# Altium PCB Proyecto_Multicapa_PCB.PcbDoc (part 1 of 2)
Units mil, origin at the board's own origin, x right, y up, seen from the top; angles counter-clockwise.
Board outline 2000 x 2600 mil, 6 copper layers (L1, L2 (GND), L3, L4, L5 (PWR), L6), stack 61.067 mil thick; 106 components, 104 nets, 402 pads, 132 vias.
Unrouted connection lines stored in the file: 69.
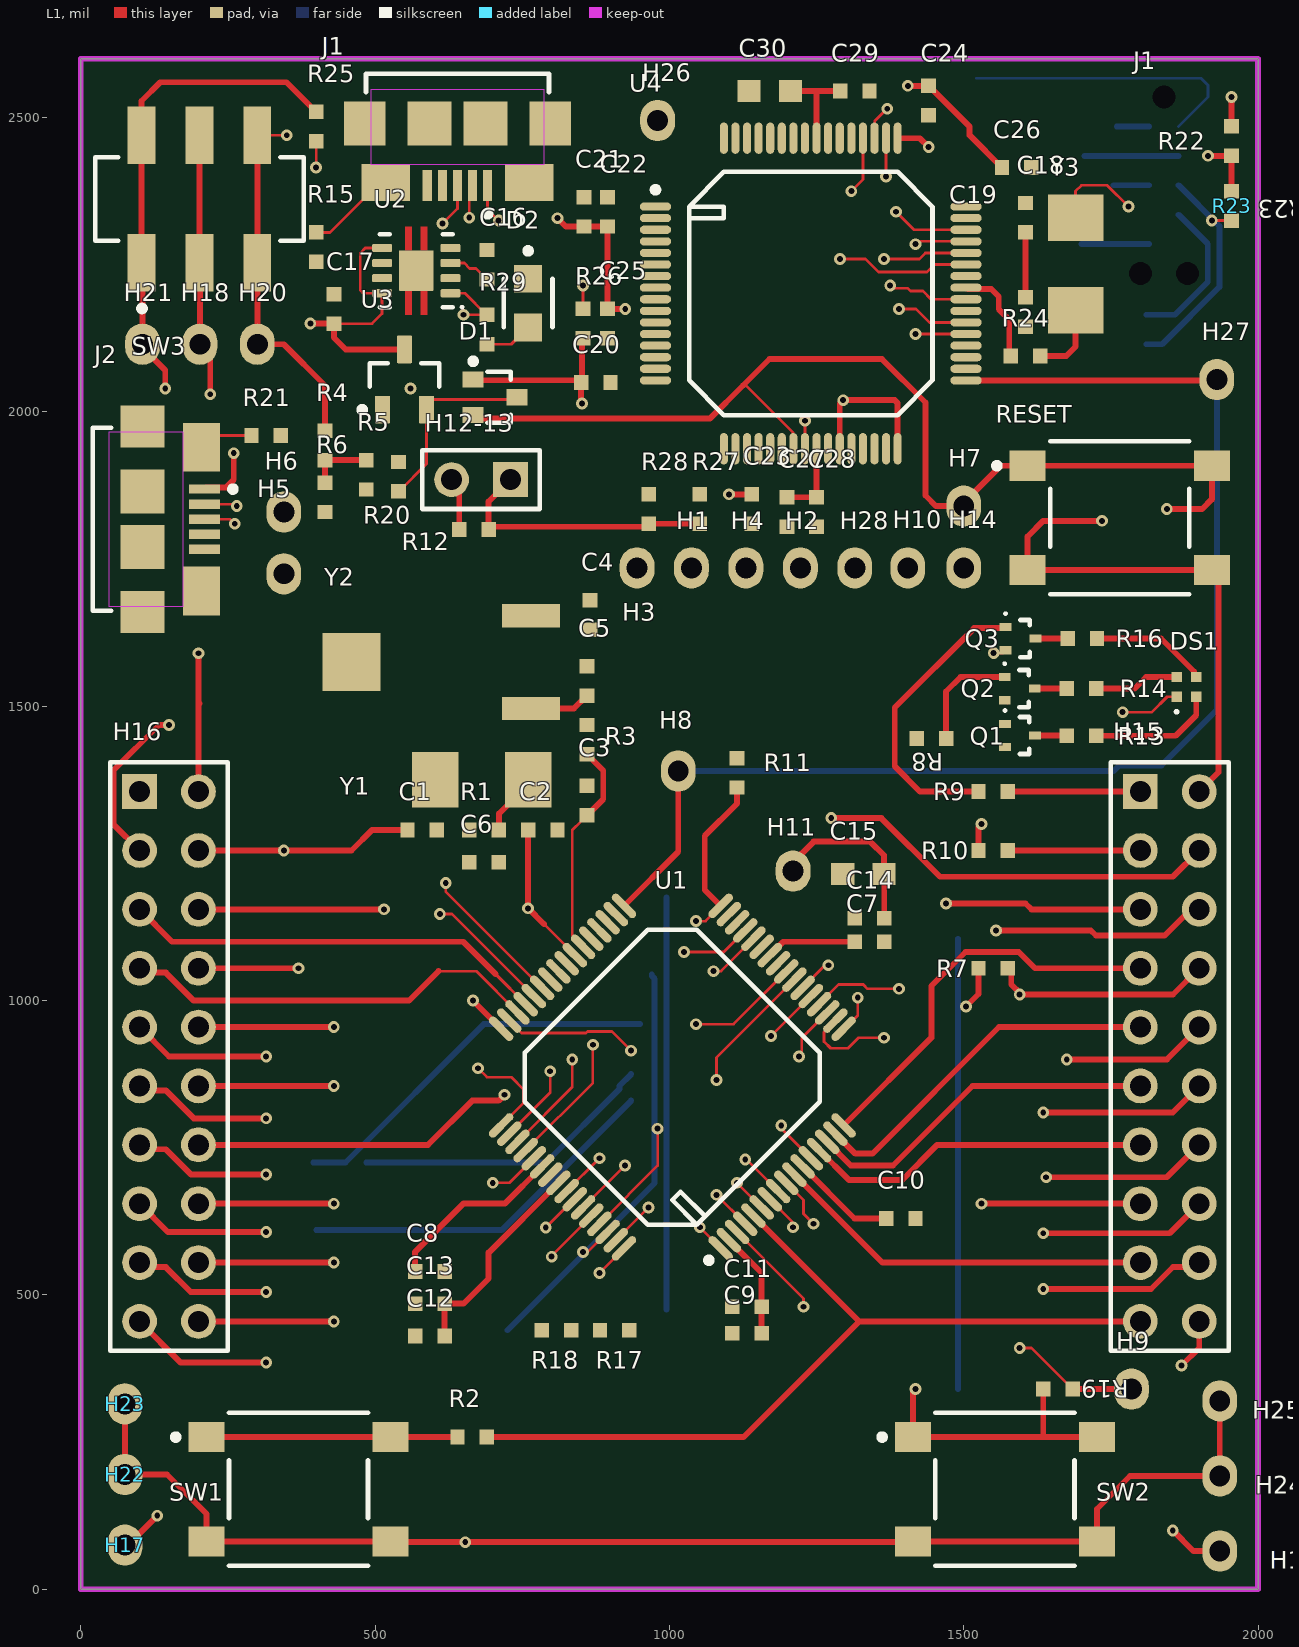
[diagram p0: L1 view]
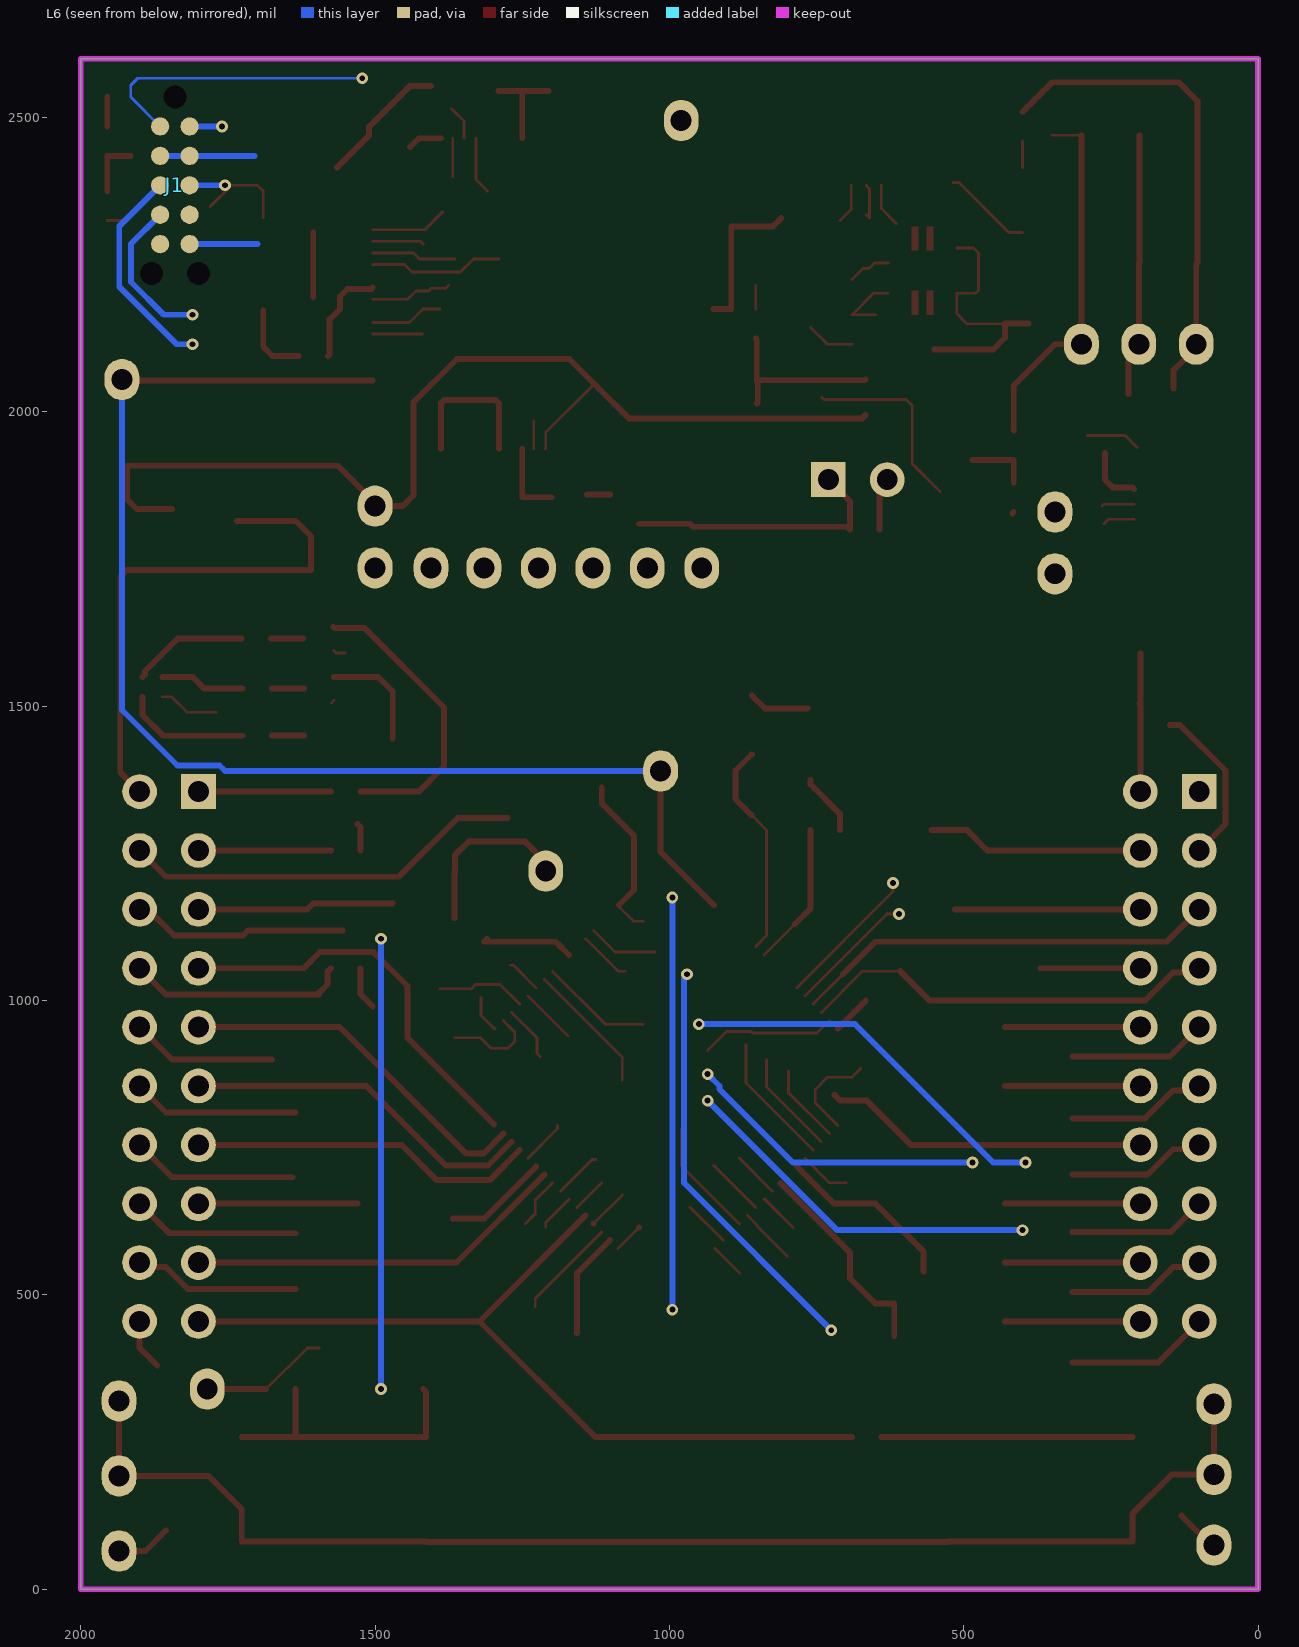
[diagram p1: L6 view, seen from below]
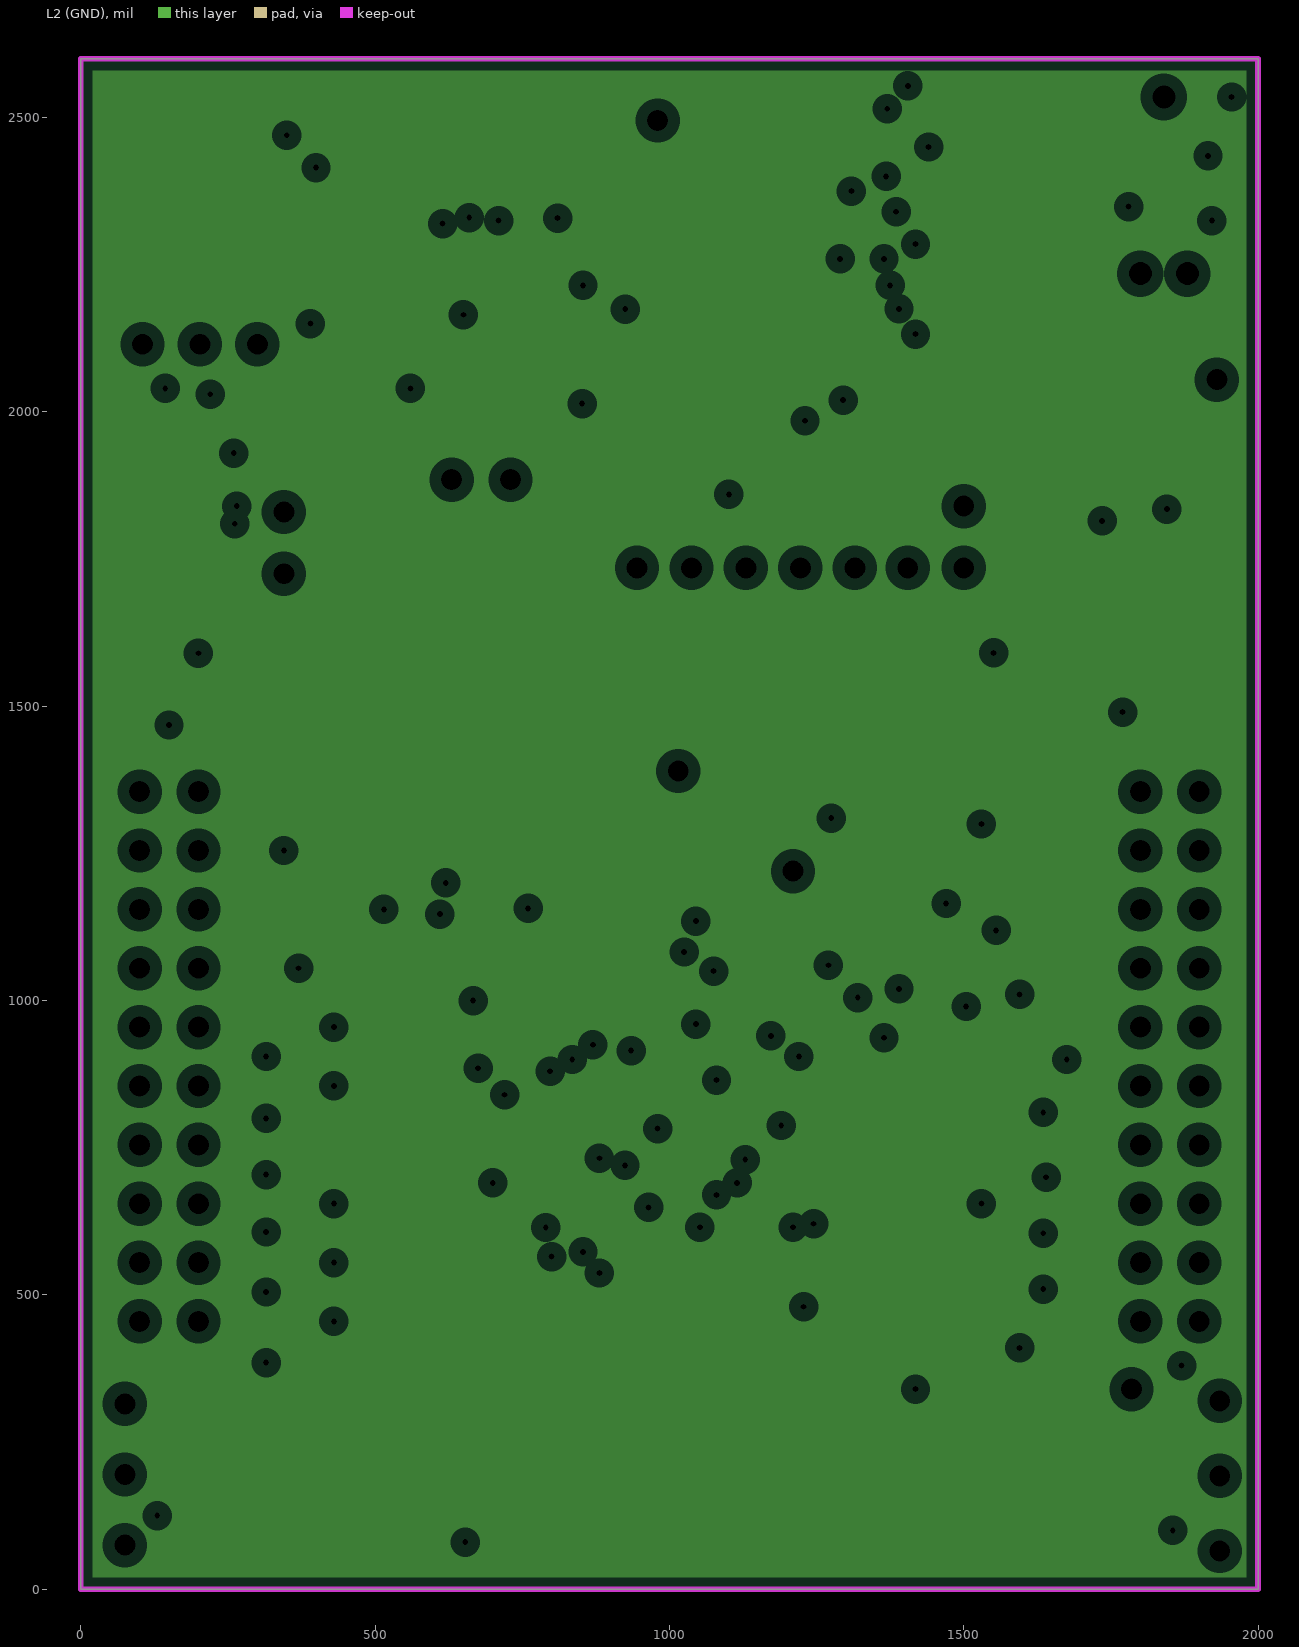
[diagram p2: L2 (GND), clearances drawn from the general rule]
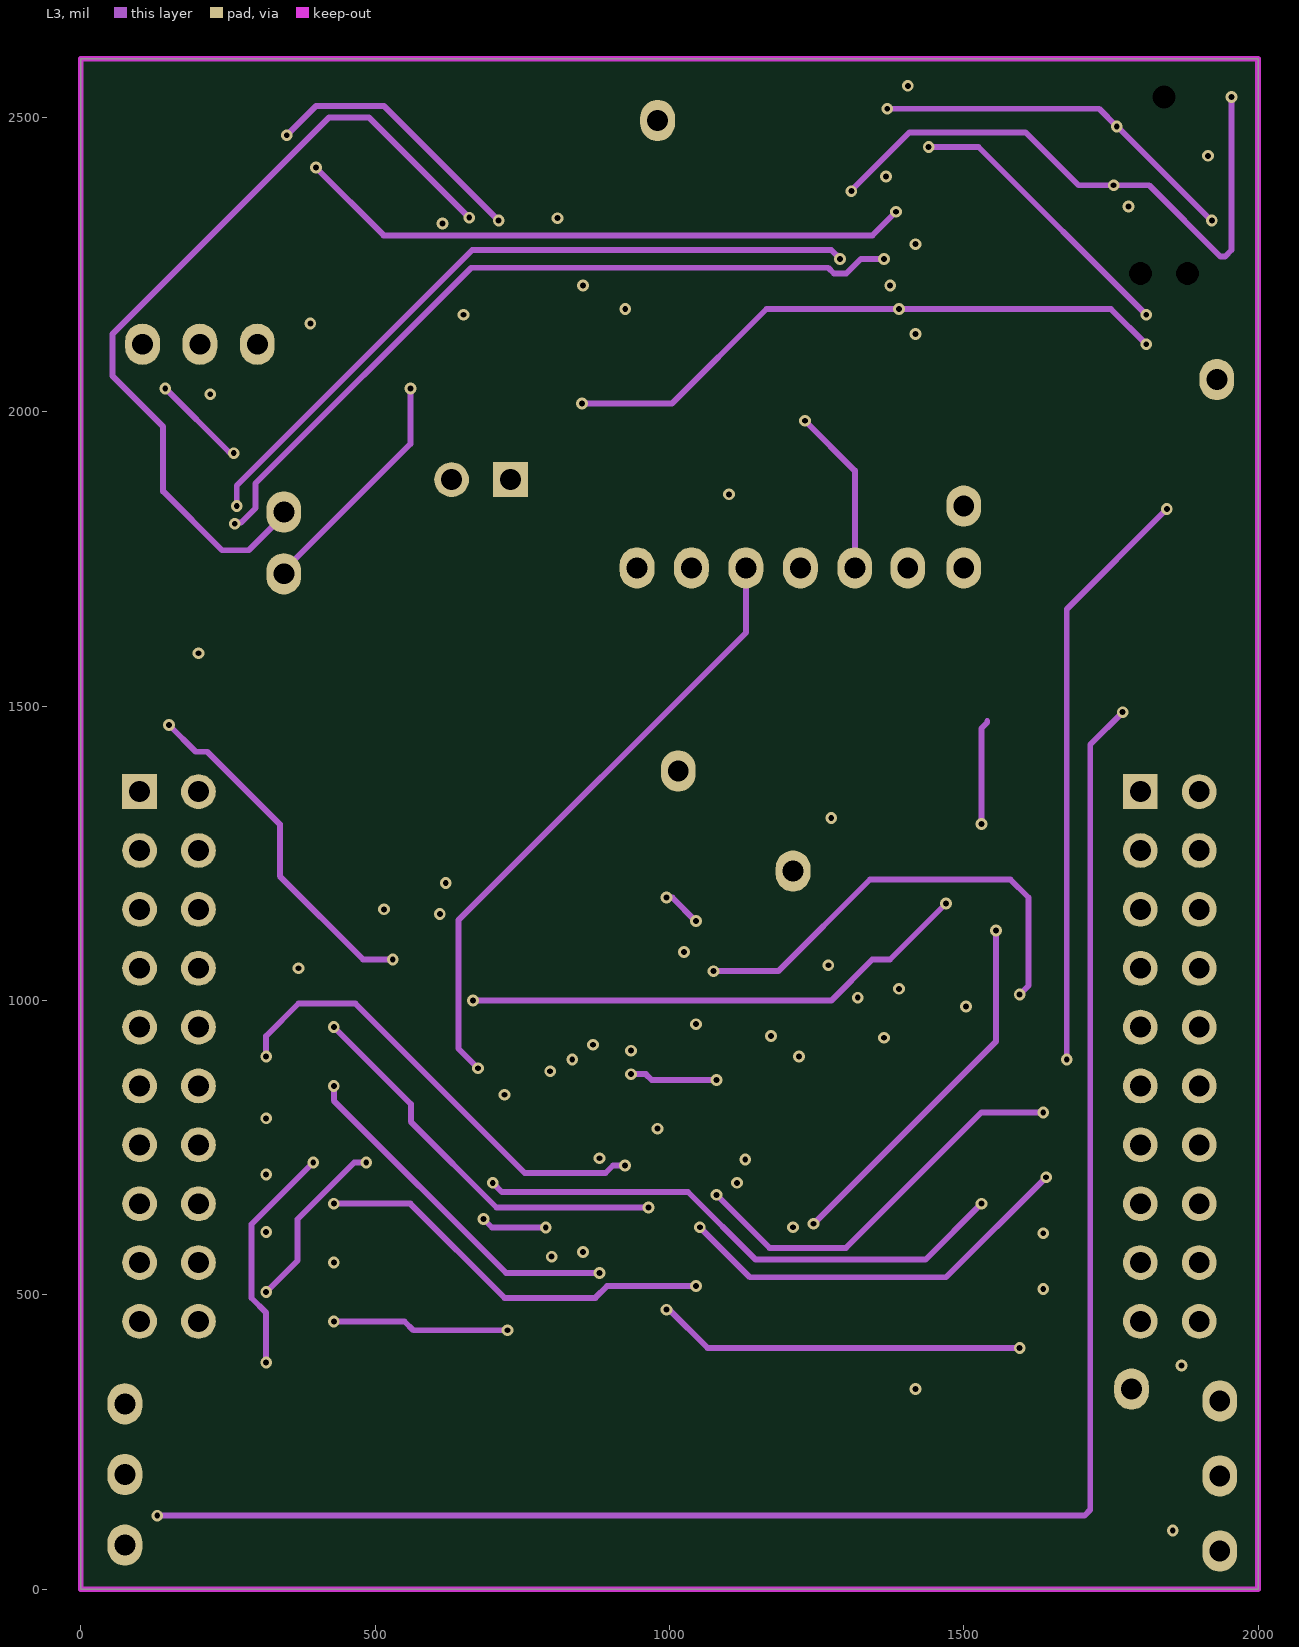
[diagram p3: L3]
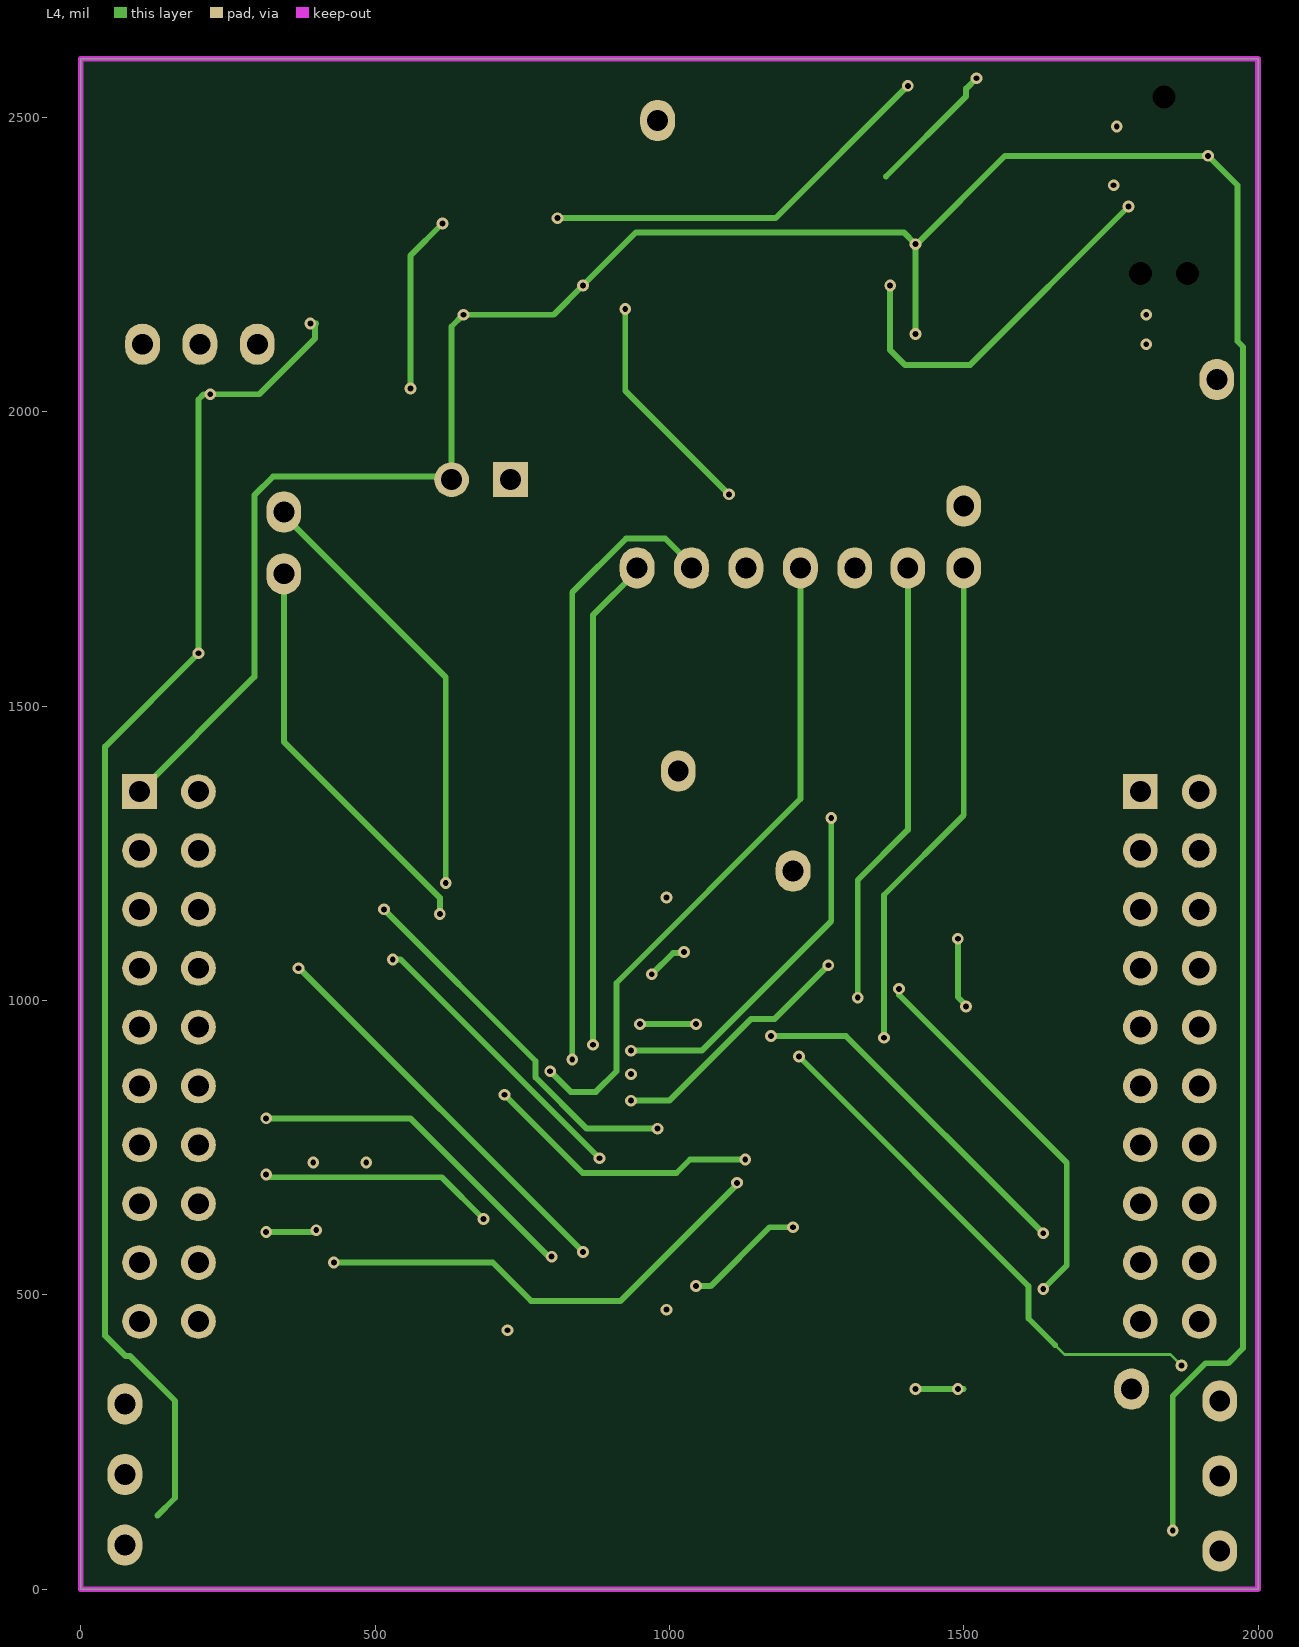
[diagram p4: L4]
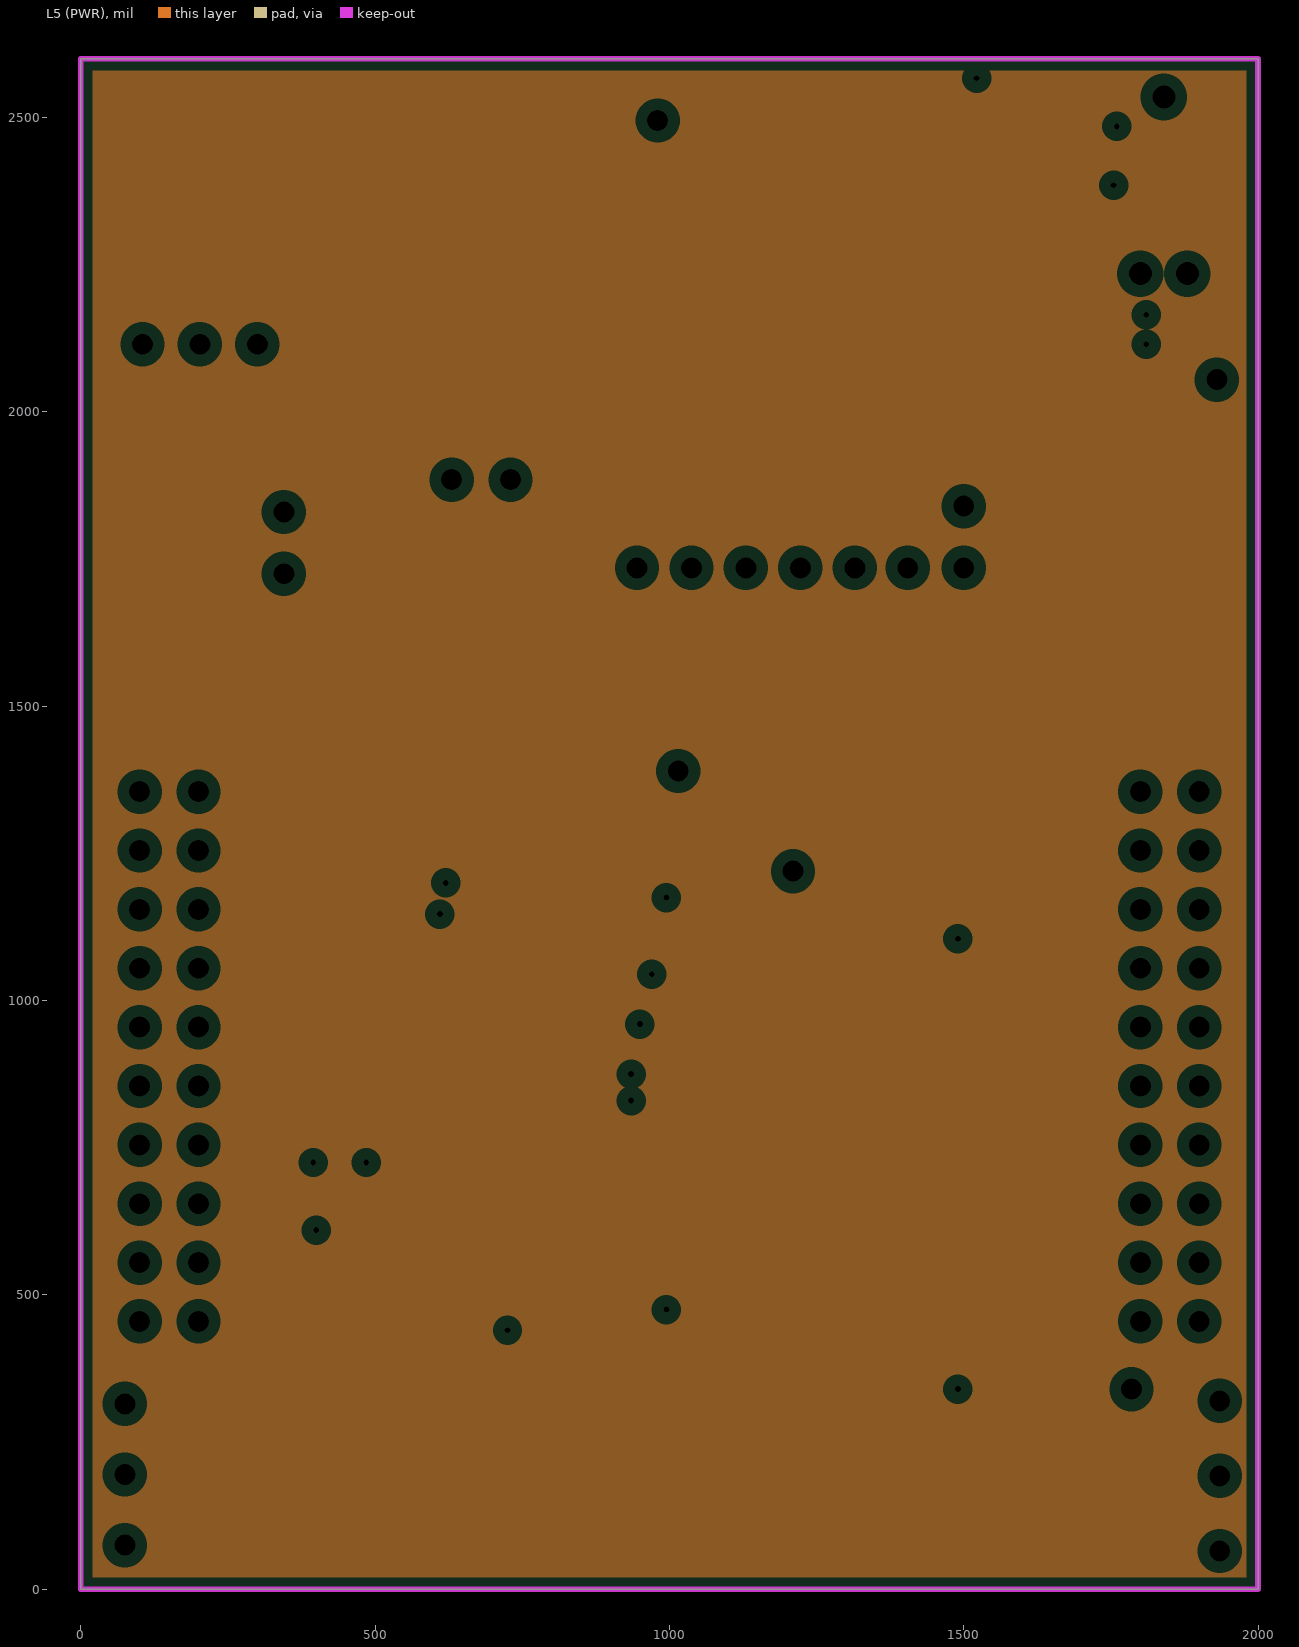
[diagram p5: L5 (PWR), clearances drawn from the general rule]

## Layer stack, top to bottom
Top Solder: solder mask 1, SM-001, Dk 4
L1: signal copper 1.3779
Dielectric 1: prepreg 2.8, PP-006, Dk 4.1
Dielectric 2: prepreg 2.8, PP-006, Dk 4.1
L2 (GND): plane copper 1.3779
Dielectric 3: core 18, Core-035, Dk 4.7
L3: signal copper 1.3779
Dielectric 4: prepreg 2.8, PP-006, Dk 4.1
Dielectric 5: prepreg 2.8, PP-006, Dk 4.1
L4: signal copper 1.3779
Dielectric 6: core 18, Core-035, Dk 4.7
L5 (PWR): plane copper 1.3779
Dielectric 7: prepreg 2.8, PP-006, Dk 4.1
Dielectric 8: prepreg 2.8, PP-006, Dk 4.1
L6: signal copper 1.3779
Bottom Solder: solder mask 1, SM-001, Dk 4

## Board outline
0,0 2000,0 2000,2600 0,2600

## Design rules (kind name [scope] priority, off if disabled: settings)
Clearance ClearanceGND [InNet('GND')] p1: gap=24 ignorepadtopadclearanceinfootprint=FALSE
Clearance Clearance5V [InNet('+VBUS')] p2: gap=24 ignorepadtopadclearanceinfootprint=FALSE
Clearance ClearanceALL [All] p3: gap=10 ignorepadtopadclearanceinfootprint=FALSE
HoleSize [All] p1: absolutevalues=TRUE maxlimit=240 minlimit=8 maxpercent=80.000 minpercent=20.000
HoleToHoleClearance [All] p1: gap=20 allowstackedmicrovias=TRUE
ParallelSegment [All] p1: limit=10000 gap=20
PlaneClearance [All] p1: clearance=20
PlaneConnect [All] p1: planeconnectstyle=Relief reliefexpansion=20 reliefentries=4 reliefconductorwidth=10 reliefairgap=10
PolygonConnect [All] p1: connectstyle=Relief reliefconductorwidth=10 reliefentries=4 polygonreliefangle="90 Angle" airgapwidth=10
RoutingVias [All] p1: holewidth=6 width=20 viastyle="Through Hole" minholewidth=4 minwidth=16 maxholewidth=10 maxwidth=24
SilkToSolderMaskClearance [IsPad] p1: minsilkscreentomaskgap=6 clearancetoexposedcopper=TRUE
SolderMaskExpansion [All] p1: expansion=10
Width [All] p1: maxlimit=15 minlimit=4.66 preferedwidth=10
25 further rules are at their usual default settings.

## Classes and differential pairs
component class Proyecto_Multicapa_Schematic: C1 C2 C3 C4 C5 C6 C7 C8 C9 C10 C11 C12 C13 C14 C15 H1 H2 H3 H4 H5 H6 H7 H8 H9 H10 H11 H12-13 H14 H15 H16 R1 R2 R3 R4 R5 R6 R7 R8 R9 R10 R11 R12 RESET U1 Y1 Y2
component class Proyecto_Multicapa_Schematic_3: C18 C19 C20 C21 C22 C23 C24 C25 C26 C27 C28 C29 C30 H26 H27 H28 J1 J2 R21 R22 R23 R24 R25 R26 R27 R28 U4 Y3
component class Proyecto_Multicapa_Schematic_2: C16 C17 D1 D2 DS1 H17 H18 H19 H20 H21 H22 H23 H24 H25 J1 Q1 Q2 Q3 R13 R14 R15 R16 R17 R18 R19 R20 R29 SW1 SW2 SW3 U2 U3

## Components (designator, comment, footprint, x,y, rotation, side; value= is the part's Value field where it differs from the comment)
C1 "10pF" C0402 580,1290 r0 top
C2 "10pF" C0402 785,1290 r0 top
C3 "0.1uF" C0402 860,1340 r90 top
C4 "24pF" C0402 865,1655 r90 top
C5 "24pF" C0402 860,1543.11 r90 top
C6 "1uF" C0402 685,1235 r180 top
C7 "0.01uF" C0402 1340,1100 r0 top
C8 "0.1uF" C0402 593.11,540 r0 top
C9 "0.01uF" C0402 1131.73,435 r180 top
C10 "0.1uF" C0402 1393.11,630 r0 top
C11 "0.01uF" C0402 1131.73,480 r180 top
C12 "1uF" C0402 593.11,430 r180 top
C13 "0.1uF" C0402 593.11,485 r180 top
C14 "0.1uF" C0402 1340,1140 r180 top
C15 "2.2uF" C0603 1329.53,1215 r180 top
C16 ".01uF" C0402 690,2250 r90 top
C17 "1uf" C0402 430,2175 r90 top
C18 "10pF" C0402 1605,2330 r90 top
C19 "10pF" C0402 1605,2170 r270 top
C20 "0.1uF" C0402 875,2050 r0 top
C21 "1uF" C0402 855,2340 r90 top
C22 "0.01uF" C0402 895,2340 r90 top
C23 "0.1uF" C0402 1140,1835 r270 top
C24 "0.01uF" C0402 1440,2528.98 r270 top
C25 "0.1uF" C0402 895,2150 r270 top
C26 "0.01uF" C0402 1590,2415 r0 top
C27 "1uF" C0402 1200,1830 r270 top
C28 "0.1uF" C0402 1250,1830 r270 top
C29 "0.1uF" C0402 1315,2545 r0 top
C30 "2.2uF" C0603 1170.47,2545 r180 top
D1 "Diode, Dual Schottky, SC70" "DIODE, DUAL SHOTTKY" 703.9,2025 r0 top
D2 "LTST-C171GKT" FP-LTST-C171GKT-MFG 760,2185 r270 top
DS1 "SMLP34RGB2W3" ROHM-SMLP34-4_V 1878.27,1532.95 r180 top
H1 "HDR1" "HDR 1X1" 1037.5,1735 r0 top
H2 "HDR1" "HDR 1X1" 1222.5,1735 r0 top
H3 "HDR1" "HDR 1X1" 945,1735 r0 top
H4 "HDR1" "HDR 1X1" 1130,1735 r0 top
H5 "HDR1" "HDR 1X1" 345,1725 r0 top
H6 "HDR1" "HDR 1X1" 345,1830 r0 top
H7 "HDR1" "HDR 1X1" 1500,1840 r0 top
H8 "HDR1" "HDR 1X1" 1015,1390 r0 top
H9 "HDR1" "HDR 1X1" 1785,340 r0 top
H10 "HDR1" "HDR 1X1" 1405,1735 r0 top
H11 "HDR1" "HDR 1X1" 1210,1220 r0 top
H12-13 "HDR JUMP 1X2" "HDR 1X2 (JUMPER)" 730,1885 r180 top
H14 "HDR1" "HDR 1X1" 1500,1735 r0 top
H15 "HDR 2X10" "HDR 2X10" 1800,1355 r270 top
H16 "HDR 2X10" "HDR 2X10" 100,1355 r270 top
H17 "HDR1" "HDR 1X1" 75,75 r0 top
H18 "HDR1" "HDR 1X1" 202.5,2115 r0 top
H19 "HDR1" "HDR 1X1" 1935,65 r0 top
H20 "HDR1" "HDR 1X1" 300,2115 r0 top
H21 "HDR1" "HDR 1X1" 105,2115 r0 top
H22 "HDR1" "HDR 1X1" 75,195 r180 top
H23 "HDR1" "HDR 1X1" 75,315 r180 top
H24 "HDR1" "HDR 1X1" 1935,192.5 r180 top
H25 "HDR1" "HDR 1X1" 1935,320 r0 top
H26 "HDR1" "HDR 1X1" 980,2495 r0 top
H27 "HDR1" "HDR 1X1" 1930,2055 r0 top
H28 "HDR1" "HDR 1X1" 1315,1735 r180 top
J1 "TC2050-IDC-NL" TC2050-IDC-NL 1840.04,2535 r270 top
J1 "ZX62-B-5PA(11)" HIRO-ZX62-B-5PA_V 640,2490 r180 top
J2 "ZX62-B-5PA(11)" HIRO-ZX62-B-5PA_V 105.02,1817.76 r270 top
Q1 "DTC114EET1G" ONSC-SC-75-3-463-01_V 1595.49,1450.32 r0 top
Q2 "DTC114EET1G" ONSC-SC-75-3-463-01_V 1595,1530 r0 top
Q3 "DTC114EET1G" ONSC-SC-75-3-463-01_V 1596.5,1615 r0 top
R1 "0" "RESIS 1M" 685,1290 r0 top
R2 "0" "RESIS 1M" 665,258.58 r180 top
R3 "10k" "RESIS 1M" 860,1443.22 r90 top
R4 "10K" "RESIS 1M" 415,1943.22 r90 top
R5 "0" "RESIS 1M" 485,1893.22 r270 top
R6 "1M" "RESIS 1M" 415,1855 r90 top
R7 "0" "RESIS 1M" 1550,1055 r0 top
R8 "0" "RESIS 1M" 1445,1445 r180 top
R9 "0" "RESIS 1M" 1550,1355 r0 top
R10 "0" "RESIS 1M" 1550,1255 r0 top
R11 "1M" "RESIS 1M" 1115,1387 r90 top
R12 "0" "RESIS 1M" 668,1800 r180 top
R13 "330" "RESIS 1M" 1700,1450 r0 top
R14 "330" "RESIS 1M" 1700,1530 r0 top
R15 "0" "RESIS 1M" 400,2280 r90 top
R16 "330" "RESIS 1M" 1701.5,1615 r0 top
R17 "0" "RESIS 1M" 907,440 r0 top
R18 "0" "RESIS 1M" 808.22,440 r0 top
R19 "330" "RESIS 1M" 1660,340 r180 top
R20 "10k" "RESIS 1M" 540,1890 r90 top
R21 "0" "RESIS 1M" 315,1960 r180 top
R22 "10k" "RESIS 1M" 1955,2460 r90 top
R23 "10k" "RESIS 1M" 1955,2350 r270 top
R24 "0" "RESIS 1M" 1605,2095 r0 top
R25 "330" "RESIS 1M" 400,2485 r270 top
R26 "10k" "RESIS 1M" 853.28,2150 r90 top
R27 "10k" "RESIS 1M" 1051.67,1835 r90 top
R28 "10k" "RESIS 1M" 965,1835 r90 top
R29 "330" "RESIS 1M" 690,2140 r90 top
RESET "B3S-1000" OMRON-B3S-1000-4_V 1765,1820 r0 top
SW1 "B3S-1000" OMRON-B3S-1000-4_V 370,170 r0 top
SW2 "B3S-1000" OMRON-B3S-1000-4_V 1570,170 r0 top
SW3 "JS202011SCQN" "DPDT SLIDE SMT" 201.98,2361.87 r0 top
U1 "LM4F120H5QRFIG" LM4F120H5QRFIG 1005,870 r135 top
U2 "TPS73633DRBR" DRB0008A_V 570,2240 r180 top
U3 "TLV803SDBZR" DBZ0003A_M 550,2055 r90 top
U4 "LM4F120H5QRFIG" LM4F120H5QRFIG 1240.16,2201.22 r0 top
Y1 "16MHz" "Crystal 16Mhz" 757.52,1375 r180 top
Y2 "32.768KHz" "Crystal 32kHz" 460,1575 r0 top
Y3 "16MHz" "Crystal 16Mhz" 1690,2175 r90 top

## Footprints (in the part's own frame and the unit in brackets; to place one, negate y for a bottom-side part, rotate by r counter-clockwise, add the part's x,y. Pads: shape width x height; smd on the part's side, far side on the other; paste and mask are expansions set on the pad)
C0402 [mm] "Capacitor SMD 0402"
  rect 0.62x0.64 smd: 1(-0.635,0) 2(0.635,0)
  body extent -0.52,-0.28 0.52,0.28, height 0.55
C0603 [mm] "Capacitor SMD 0603"
  rect 1x0.95 smd: 1(-0.889,0) 2(0.889,0)
  body extent -0.85,-0.45 0.85,0.45, height 0.9
"Crystal 16Mhz" [mm]
  rect 2x2.4 smd: 1(-0.063,0) 2(3.937,0)
"Crystal 32kHz" [mm]
  rect 2.5x2.5 smd: 0(0,0)
  rect 2.5x1 smd: 1(7.75,2) 2(7.75,-2)
DBZ0003A_M [mm] "SOT23, 3-Leads, Body 3.04x1.4mm, Pitch 0.95mm, IPC Low Density"
  rrect15% 1.2x0.65 smd: 1(-1.3,0.95) 2(-1.3,-0.95) 3(1.3,0)
  silkscreen extent -1.42,-1.5 0.7,1.95, body extent -1.26,-1.46 1.26,1.46, height 0.96
"DIODE, DUAL SHOTTKY" [mm] "SOT23, 3-Leads, Body 2.00x2.10mm, Pitch 0.65mm, IPC Medium Density"
  rect 0.9x0.7 smd: 1(-0.95,0.762) 2(-0.95,-0.762) 3(0.95,0)
  silkscreen extent -1.07,-1.1 0.67,1.67, body extent -0.67,-1.1 0.67,1.1, height 1.1
"DPDT SLIDE SMT" [mm]
  rect 1.2x2.5 smd paste+0 mask+0: 1(-2.51,-2.753) 2(-0.01,-2.753) 3(2.49,-2.753) 4(-2.51,2.747) 5(-0.01,2.747) 6(2.49,2.747)
  silkscreen extent -4.51,-4.85 4.49,1.8, body extent -4.53,-3.5 4.47,3.5, height 5.65
DRB0008A_V [mm] "SON, 8-Leads, Body 3x3mm, Pitch 0.65mm, Thermal Pad 1.50 x 3.8mm"
  rrect29% 0.85x0.35 smd: 1(-1.475,0.975) 2(-1.475,0.325) 3(-1.475,-0.325) 4(-1.475,-0.975) 5(1.475,-0.975) 6(1.475,-0.325) 7(1.475,0.325) 8(1.475,0.975)
  rrect7% 1.5x1.75 smd: 9(0,0)
  L1 region: 0.185,0.875 0.185,1.9 0.465,1.9 0.465,0.875
  L1 region: -0.185,-0.875 -0.185,-1.9 -0.465,-1.9 -0.465,-0.875
  L1 region: 0.185,-0.875 0.185,-1.9 0.465,-1.9 0.465,-0.875
  L1 region: -0.185,0.875 -0.185,1.9 -0.465,1.9 -0.465,0.875
  silkscreen extent -2.02,-1.58 1.57,1.62, body extent -1.5,-1.5 1.5,1.5, height 1
FP-LTST-C171GKT-MFG [mm]
  rect 1.2x1.2 smd paste+0 mask+0: 1(-1.05,0) 2(1.05,0)
  silkscreen extent -2.37,-1.05 1.05,1.05, body extent -1.75,-0.77 1.75,0.77, height 0.25
"HDR 1X1" [mm]
  oval 1.5x1.778 hole 0.9: 1(0,0)
"HDR 1X2 (JUMPER)" [mm]
  rect 1.5x1.5 hole 0.9: 1(0,0)
  round 1.5 hole 0.9: 2(2.54,0)
  silkscreen extent -1.27,-1.27 3.81,1.27, body extent -1.27,-1.27 3.81,1.27, height 8.72
"HDR 2X10" [mm]
  rect 1.5x1.5 hole 0.9: 1(0,0)
  round 1.5 hole 0.9: 2(2.54,0) 3(5.08,0) 4(7.62,0) 5(10.16,0) 6(12.7,0) 7(15.24,0) 8(17.78,0) 9(20.32,0) 10(22.86,0) 11(0,2.54) 12(2.54,2.54) 13(5.08,2.54) 14(7.62,2.54) 15(10.16,2.54) 16(12.7,2.54) 17(15.24,2.54) 18(17.78,2.54) 19(20.32,2.54) 20(22.86,2.54)
  silkscreen extent -1.27,-1.27 24.13,3.81, body extent -1.52,-1.23 24.38,3.77, height 3
HIRO-ZX62-B-5PA_V [mm] "SMT, 5-Leads, Body 7.9x5mm, Pitch 0.65mm"
  rect 0.4x1.35 smd: 1(-1.3,2.675) 2(-0.65,2.675) 3(0,2.675) 4(0.65,2.675) 5(1.3,2.675)
  rect 2.1x1.6 smd: 6(3.1,2.55) 7(-3.1,2.55)
  rect 1.8x1.9 smd: 8(-4,0) 9(4,0)
  rect 1.9x1.9 smd: 10(1.2,0) 11(-1.2,0)
  L1 keep-out region: -3.75,-1.45 3.75,-1.45 3.75,1.75 -3.75,1.75
  silkscreen extent -3.95,-2.15 3.95,4.02, body extent -3.95,-2.15 3.95,2.85, height 2.8
LM4F120H5QRFIG [mm] "CQFP, 64-Leads, Body 14.70x14.70mm, Pitch 0.50mm, IPC Medium Density"
  oval 1.35x0.35 smd: 1(-6.7,3.75) 2(-6.7,3.25) 3(-6.7,2.75) 4(-6.7,2.25) 5(-6.7,1.75) 6(-6.7,1.25) 7(-6.7,0.75) 8(-6.7,0.25) 9(-6.7,-0.25) 10(-6.7,-0.75) 11(-6.7,-1.25) 12(-6.7,-1.75) 13(-6.7,-2.25) 14(-6.7,-2.75) 15(-6.7,-3.25) 16(-6.7,-3.75) 33(6.7,-3.75) 34(6.7,-3.25) 35(6.7,-2.75) 36(6.7,-2.25) 37(6.7,-1.75) 38(6.7,-1.25) 39(6.7,-0.75) 40(6.7,-0.25) 41(6.7,0.25) 42(6.7,0.75) 43(6.7,1.25) 44(6.7,1.75) 45(6.7,2.25) 46(6.7,2.75) 47(6.7,3.25) 48(6.7,3.75)
  oval 0.35x1.35 smd: 17(-3.75,-6.7) 18(-3.25,-6.7) 19(-2.75,-6.7) 20(-2.25,-6.7) 21(-1.75,-6.7) 22(-1.25,-6.7) 23(-0.75,-6.7) 24(-0.25,-6.7) 25(0.25,-6.7) 26(0.75,-6.7) 27(1.25,-6.7) 28(1.75,-6.7) 29(2.25,-6.7) 30(2.75,-6.7) 31(3.25,-6.7) 32(3.75,-6.7) 49(3.75,6.7) 50(3.25,6.7) 51(2.75,6.7) 52(2.25,6.7) 53(1.75,6.7) 54(1.25,6.7) 55(0.75,6.7) 56(0.25,6.7) 57(-0.25,6.7) 58(-0.75,6.7) 59(-1.25,6.7) 60(-1.75,6.7) 61(-2.25,6.7) 62(-2.75,6.7) 63(-3.25,6.7) 64(-3.75,6.7)
  silkscreen extent -6.82,-5.25 5.25,5.25, body extent -5,-5 5,5, height 1.6
OMRON-B3S-1000-4_V [mm] "SMD, 4-Leads, Body 6.6x6mm"
  rect 1.55x1.3 smd: 1(-3.975,2.25) 2(3.975,2.25) 3(-3.975,-2.25) 4(3.975,-2.25)
  silkscreen extent -5.42,-3.3 3,3.3, body extent -4.5,-3.3 4.5,3.3, height 4.4
ONSC-SC-75-3-463-01_V [mil] "SOT23, 3-Leads, Body 1.6x0.8mm, Pitch 0.5mm"
  rect 20x14.02 smd: 1(-25.49,19.68) 2(-25.49,-19.69) 3(25.49,0)
  silkscreen extent -27,-31 16,44, body extent -16,-31 16,31, height 35
"RESIS 1M" [mm]
  rect 0.62x0.64 smd: 1(-0.635,0) 2(0.635,0)
  body extent -0.52,-0.28 0.52,0.28, height 0.55
ROHM-SMLP34-4_V [mm] "SMD, 4-Leads, Body 1x1mm, Pitch 0.85mm"
  rect 0.45x0.45 smd: 1(0.425,0.425) 2(0.425,-0.425) 3(-0.425,-0.425) 4(-0.425,0.425)
  silkscreen extent 0.36,1.01 0.49,1.14, body extent -0.5,-0.5 0.5,0.5, height 0.25
TC2050-IDC-NL [mm]
  round 0 hole 0.991: 0(0,0) 0(7.62,-1.015) 0(7.62,1.015)
  round 0.787 smd far side: 1(1.27,-0.635) 2(2.54,-0.635) 3(3.81,-0.635) 4(5.08,-0.635) 5(6.35,-0.635) 6(6.35,0.635) 7(5.08,0.635) 8(3.81,0.635) 9(2.54,0.635) 10(1.27,0.635)

## Part data
C1 C2 C18 C19: library part GRM1555C1H100JZ01D, "Cap Ceramic 10pF 50V C0G 5% SMD 0402 125°C Paper T/R", Case/Package=0402, Case Code (Metric)=1005, Dielectric=C0G, Dielectric Material=Ceramic, Insulation Resistance=10GR, Manufacturer=Murata, Max Operating Temperature=125°C, Min Operating Temperature=-55°C, Package Quantity=1, Supplier Part Number 1=1118131, Temperature Coefficient=30ppm/°C, Tolerance=5%, Voltage=50V, Capacitance=10pF, Case Code (Imperial)=0402, ComponentLink1Description=https://datasheet.ciiva.com/129/partnumbering-e-01-129819.pdf?src-supplier=Digi-Key, ComponentLink1URL=https://datasheet.ciiva.com/129/partnumbering-e-01-129819.pdf?src-supplier=Digi-Key, ComponentLink2Description=https://datasheet.ciiva.com/129/partnumbering-e-01-129820.pdf?src-supplier=Digi-Key, ComponentLink2URL=https://datasheet.ciiva.com/129/partnumbering-e-01-129820.pdf?src-supplier=Digi-Key, ComponentLink3Description=https://datasheet.ciiva.com/129/partnumbering-e-01-129821.pdf?src-supplier=Digi-Key, ComponentLink3URL=https://datasheet.ciiva.com/129/partnumbering-e-01-129821.pdf?src-supplier=Digi-Key, ComponentLink4Description=https://datasheet.ciiva.com/19476/1855887-19476237.pdf?src-supplier=Jameco, ComponentLink4URL=https://datasheet.ciiva.com/19476/1855887-19476237.pdf?src-supplier=Jameco, ComponentLink5Description=https://datasheet.ciiva.com/18184/getdatasheetpartid-91958-18184166.pdf?src-supplier=Verical, ComponentLink5URL=https://datasheet.ciiva.com/18184/getdatasheetpartid-91958-18184166.pdf?src-supplier=Verical, ComponentLink6Description=https://datasheet.ciiva.com/11787/0900766b807a1cab-11787097.pdf?src-supplier=RSComponents, ComponentLink6URL=https://datasheet.ciiva.com/11787/0900766b807a1cab-11787097.pdf?src-supplier=RSComponents, ComponentLink7Description=https://datasheet.ciiva.com/6068/1747431-6068159.pdf?src-supplier=Farnell, ComponentLink7URL=https://datasheet.ciiva.com/6068/1747431-6068159.pdf?src-supplier=Farnell, ComponentLink8Description=https://datasheet.ciiva.com/11607/c02e-11607480.pdf?src-supplier=Avnet, ComponentLink8URL=https://datasheet.ciiva.com/11607/c02e-11607480.pdf?src-supplier=Avnet, ComponentLink9Description=https://datasheet.ciiva.com/14116/grmseries-tc-hitype-eng-14116856.pdf?src-supplier=Distrelec, ComponentLink9URL=https://datasheet.ciiva.com/14116/grmseries-tc-hitype-eng-14116856.pdf?src-supplier=Distrelec, ComponentLink10Description=https://datasheet.ciiva.com/14116/grmseries-tc-hitype-eng-14116917.pdf?src-supplier=Distrelec, ComponentLink10URL=https://datasheet.ciiva.com/14116/grmseries-tc-hitype-eng-14116917.pdf?src-supplier=Distrelec, ComponentLink11Description=https://datasheet.ciiva.com/7828/1747431-7828813.pdf?src-supplier=Element14, ComponentLink11URL=https://datasheet.ciiva.com/7828/1747431-7828813.pdf?src-supplier=Element14, ComponentLink12Description=https://datasheet.ciiva.com/7828/1747431-7828815.pdf?src-supplier=Element14, ComponentLink12URL=https://datasheet.ciiva.com/7828/1747431-7828815.pdf?src-supplier=Element14, Construction=Flat, Depth=0.5mm, Height=0.5mm, Lead Free="Lead Free", Length=1mm, Manufacturer Part Number=GRM1555C1H100JZ01D, Mount="Surface Mount", Number of Pins=2, Packaging="Tape and Reel", Pricing 1="1 = 37.68000, 3 = 28.53000 (GBP)", Radiation Hardening=No, REACH SVHC="No SVHC", RoHS=Yes, RoHS Compliant=Yes, Series=GRM, Size=0.5mm, Stock 1=0, Supplier 1=Farnell, Termination=SMD/SMT, Thickness=0.022inch, Voltage Rating=50V, Voltage Rating (DC)=50V, Width=0.5mm
C3 C8 C10 C13 C14 C20 C23 C25 C28 C29: library part EMK105B7104KV-F, "0402 0.1 uF 16 V ±10% Tolerance X7R Multilayer Ceramic Chip Capacitor", Capacitance=100nF, Case/Package=0402, Case Code (Metric)=1005, Dielectric=X7R, Manufacturer="Taiyo Yuden", Max Operating Temperature=125°C, Min Operating Temperature=-55°C, Package Quantity=1, Resistor Type=Ceramic, Supplier Part Number 1=1721352, Tolerance=10%, Voltage Rating=16V, Case Code (Imperial)=0402, ComponentLink1Description=https://datasheet.ciiva.com/129/emk105b7104kv-f-ss-129714.pdf?src-supplier=Digi-Key, ComponentLink1URL=https://datasheet.ciiva.com/129/emk105b7104kv-f-ss-129714.pdf?src-supplier=Digi-Key, ComponentLink2Description=https://datasheet.ciiva.com/30227/emk105b7104kv-f-30227394.pdf?src-supplier=Onlinecomponents.com, ComponentLink2URL=https://datasheet.ciiva.com/30227/emk105b7104kv-f-30227394.pdf?src-supplier=Onlinecomponents.com, ComponentLink3Description=https://datasheet.ciiva.com/22748/746258-22748959.pdf?src-supplier=Element14, ComponentLink3URL=https://datasheet.ciiva.com/22748/746258-22748959.pdf?src-supplier=Element14, Construction=Flat, Depth=0.5mm, Halogen Free="Halogen Free", Height=0.5mm, Lead Free="Lead Free", Length=1mm, Manufacturer Part Number=EMK105B7104KV-F, Mount="Surface Mount", Number of Pins=2, Packaging="Tape and Reel", Pricing 1="10000 = 0.00300 (GBP)", Radiation Hardening=No, REACH SVHC=Unknown, RoHS=Yes, RoHS Compliant=Yes, Series=M, Stock 1=30000, Supplier 1=RSComponents, Termination=SMD/SMT, Thickness=0.022inch, Voltage Rating (DC)=16V, Width=0.02inch
C4 C5: library part C1005C0G1H240J, "Capacitor Ceramic 24PF 50V, C0G, 5%, 0402, Full Reel", Case/Package=0402, Case Code (Metric)=1005, Dielectric=C0G, Dielectric Material=Ceramic, Manufacturer=TDK, Max Operating Temperature=125°C, Min Operating Temperature=-55°C, Package Quantity=1, Supplier Part Number 1=87R3204, Tolerance=5%, Voltage Rating=50V, Capacitance=24pF, Case Code (Imperial)=0402, ComponentLink1Description=https://datasheet.ciiva.com/161/c-series-generalappl-b11-161778.pdf?src-supplier=Digi-Key, ComponentLink1URL=https://datasheet.ciiva.com/161/c-series-generalappl-b11-161778.pdf?src-supplier=Digi-Key, ComponentLink2Description=https://datasheet.ciiva.com/161/c-series-generalappl-b11-161779.pdf?src-supplier=Digi-Key, ComponentLink2URL=https://datasheet.ciiva.com/161/c-series-generalappl-b11-161779.pdf?src-supplier=Digi-Key, ComponentLink3Description=https://datasheet.ciiva.com/161/c-series-generalappl-b11-161780.pdf?src-supplier=Digi-Key, ComponentLink3URL=https://datasheet.ciiva.com/161/c-series-generalappl-b11-161780.pdf?src-supplier=Digi-Key, ComponentLink4Description=https://datasheet.ciiva.com/5418/mlcc-commercial-general-en-5418382.pdf?src-supplier=Mouser, ComponentLink4URL=https://datasheet.ciiva.com/5418/mlcc-commercial-general-en-5418382.pdf?src-supplier=Mouser, Construction=Flat, Height=0.5mm, Length=0.039inch, Manufacturer Part Number=C1005C0G1H240J, Mount="Surface Mount", Number of Pins=2, Packaging="Tape and Reel", Resistor Type=Ceramic, RoHS=Yes, Series=C, Stock 1=0, Supplier 1=Newark, Termination=SMD/SMT, Thickness=0.022inch, Voltage Rating (DC)=50V, Width=0.02inch
C6 C12 C21 C27: library part 100R07X105KV4T, "Multilayer Ceramic Capacitor, Tanceram Series, 1 - F, - 10%, X5R, 10 V, 0402 [1005 Metric]", Case/Package=0402, Case Code (Metric)=1005, Dielectric=X5R, Manufacturer=Johanson, Max Operating Temperature=85°C, Min Operating Temperature=-55°C, Package Quantity=10000, Supplier Part Number 1=605-100R07X105KV4T, Tolerance=10%, Voltage Rating=10V, Capacitance=1uF, Case Code (Imperial)=0402, ComponentLink1Description=https://datasheet.ciiva.com/26948/getdatasheetpartid-789067-26948543.pdf?src-supplier=Verical, ComponentLink1URL=https://datasheet.ciiva.com/26948/getdatasheetpartid-789067-26948543.pdf?src-supplier=Verical, ComponentLink2Description=https://datasheet.ciiva.com/22693/jdi-full-catalog-2012-01-22693744.pdf?src-supplier=Element14, ComponentLink2URL=https://datasheet.ciiva.com/22693/jdi-full-catalog-2012-01-22693744.pdf?src-supplier=Element14, Depth=0.51mm, Height=0.64mm, Length=1.02mm, Manufacturer Part Number=100R07X105KV4T, Mount="Surface Mount", Number of Pins=2, Packaging="Tape and Reel", Pricing 1="1 = 0.28000, 10 = 0.19300, 50 = 0.19300, 100 = 0.09800, 500 = 0.06700, 1000 = 0.06000, 2500 = 0.05700, 5000 = 0.05200, 10000 = 0.04800 (USD)", Radiation Hardening=No, REACH SVHC="No SVHC", RoHS=Yes, RoHS Compliant=Yes, Series=TANCERAM®, Stock 1=61365, Supplier 1=Mouser, Termination=SMD/SMT, Thickness=0.025inch, Voltage Rating (DC)=10V, Weight=2.3E-05oz, Width=0.02inch
C7 C9 C11 C16 C22 C24 C26: library part TMK105B7103KV-F, "0402 0.01 uF 25 V ±10% X7R Automotive Multilayer Ceramic Capacitor", Capacitance=10nF, Case/Package=0402, Case Code (Metric)=1005, Dielectric=X7R, Manufacturer="Taiyo Yuden", Max Operating Temperature=125°C, Min Operating Temperature=-55°C, Package Quantity=1, Resistor Type=Ceramic, Supplier Part Number 1=77M8496, Tolerance=10%, Voltage=25V, Case Code (Imperial)=0402, ComponentLink1Description=https://datasheet.ciiva.com/129/tmk105b7103kv-f-ss-129699.pdf?src-supplier=Digi-Key, ComponentLink1URL=https://datasheet.ciiva.com/129/tmk105b7103kv-f-ss-129699.pdf?src-supplier=Digi-Key, ComponentLink2Description=https://datasheet.ciiva.com/30192/438tmk105b7103kv-f-30192315.pdf?src-supplier=Onlinecomponents.com, ComponentLink2URL=https://datasheet.ciiva.com/30192/438tmk105b7103kv-f-30192315.pdf?src-supplier=Onlinecomponents.com, ComponentLink3Description=https://datasheet.ciiva.com/15922/204tmk105b7103kv-f-15922348.pdf?src-supplier=Onlinecomponents.com, ComponentLink3URL=https://datasheet.ciiva.com/15922/204tmk105b7103kv-f-15922348.pdf?src-supplier=Onlinecomponents.com, ComponentLink4Description=https://datasheet.ciiva.com/30156/190tmk105b7103kv-f-30156174.pdf?src-supplier=Onlinecomponents.com, ComponentLink4URL=https://datasheet.ciiva.com/30156/190tmk105b7103kv-f-30156174.pdf?src-supplier=Onlinecomponents.com, ComponentLink5Description=https://datasheet.ciiva.com/28645/746258-28645254.pdf?src-supplier=Element14, ComponentLink5URL=https://datasheet.ciiva.com/28645/746258-28645254.pdf?src-supplier=Element14, ComponentLink6Description=https://datasheet.ciiva.com/7975/746258-7975835.pdf?src-supplier=Element14, ComponentLink6URL=https://datasheet.ciiva.com/7975/746258-7975835.pdf?src-supplier=Element14, Construction=Flat, Contact Plating=Tin, Depth=0.5mm, Halogen Free="Halogen Free", Height=0.5mm, Length=1mm, Manufacturer Part Number=TMK105B7103KV-F, Mount="Surface Mount", Packaging="Tape and Reel", Pricing 1="1 = 0.00200, 25 = 0.00200, 100 = 0.00200, 250 = 0.00200, 500 = 0.00200, 1000 = 0.00200, 2500 = 0.00200, 5000 = 0.00200 (USD)", REACH SVHC=Unknown, RoHS=Yes, RoHS Compliant=Yes, Series=M, Stock 1=2, Supplier 1=Newark, Termination=SMD/SMT, Thickness=0.022inch, Voltage Rating=25V, Voltage Rating (DC)=25V, Width=0.02inch
C15 C30: library part GRM188R61C225KE15D, "0603 2.2 uF 16 V ±10% Tolerance X5R SMT Multilayer Ceramic Capacitor", Case/Package=0603, Case Code (Metric)=1608, Dielectric=X5R, Manufacturer=Murata, Max Operating Temperature=85°C, Min Operating Temperature=-55°C, Package Quantity=1, Tolerance=10%, Voltage=16V, Capacitance=2.2uF, Case Code (Imperial)=0603, ComponentLink1Description=https://datasheet.ciiva.com/135/grm188r61c225ke15-01-135062.pdf?src-supplier=Digi-Key, ComponentLink1URL=https://datasheet.ciiva.com/135/grm188r61c225ke15-01-135062.pdf?src-supplier=Digi-Key, ComponentLink2Description=https://datasheet.ciiva.com/135/grm188r61c225ke15-01-135063.pdf?src-supplier=Digi-Key, ComponentLink2URL=https://datasheet.ciiva.com/135/grm188r61c225ke15-01-135063.pdf?src-supplier=Digi-Key, ComponentLink3Description=https://datasheet.ciiva.com/5417/product-5417088.pdf?src-supplier=Mouser, ComponentLink3URL=https://datasheet.ciiva.com/5417/product-5417088.pdf?src-supplier=Mouser, ComponentLink4Description=https://datasheet.ciiva.com/3777/147grm188r61c225ke1523-3777042.pdf?src-supplier=Arrow+Electronics, ComponentLink4URL=https://datasheet.ciiva.com/3777/147grm188r61c225ke1523-3777042.pdf?src-supplier=Arrow+Electronics, ComponentLink5Description=https://datasheet.ciiva.com/29199/454457-da-01-en-vs-kondensator-0603-29199689.pdf?src-supplier=Conrad, ComponentLink5URL=https://datasheet.ciiva.com/29199/454457-da-01-en-vs-kondensator-0603-29199689.pdf?src-supplier=Conrad, ComponentLink6Description=https://datasheet.ciiva.com/135/grm188r61c225ke15-01-135061.pdf?src-supplier=Digi-Key, ComponentLink6URL=https://datasheet.ciiva.com/135/grm188r61c225ke15-01-135061.pdf?src-supplier=Digi-Key, ComponentLink7Description=https://datasheet.ciiva.com/16369/product-16369274.pdf?src-supplier=Future+Electronics, ComponentLink7URL=https://datasheet.ciiva.com/16369/product-16369274.pdf?src-supplier=Future+Electronics, Depth=0.8mm, Height=0.8mm, Lead Free="Lead Free", Length=1.6mm, Manufacturer Part Number=GRM188R61C225KE15D, Material=Ceramic, Mount="Surface Mount", Packaging="Tape and Reel", Pricing 1="4000 = 0.07480, 8000 = 0.06840, 12000 = 0.05830, 20000 = 0.05480, 24000 = 0.05360, 100000 = 0.05210 (USD)", Radiation Hardening=No, REACH SVHC="No SVHC", RoHS=Yes, RoHS Compliant=Yes, Stock 1=80000, Supplier 1="Arrow Electronics", Supplier Part Number 1=GRM188R61C225KE15D, Termination=SMD/SMT, Thickness=0.035inch, Voltage Rating=16V, Voltage Rating (DC)=16V, Width=0.8mm
C17: library part 100R07X105KV4T, "Multilayer Ceramic Capacitor, Tanceram Series, 1 - F, - 10%, X5R, 10 V, 0402 [1005 Metric]", Capacitance=1uF, Case/Package=0402, Case Code (Metric)=1005, Dielectric=X5R, Manufacturer=Johanson, Max Operating Temperature=85°C, Min Operating Temperature=-55°C, Package Quantity=10000, Supplier Part Number 1=605-100R07X105KV4T, Tolerance=10%, Voltage Rating=10V, Case Code (Imperial)=0402, ComponentLink1Description=https://datasheet.ciiva.com/26948/getdatasheetpartid-789067-26948543.pdf?src-supplier=Verical, ComponentLink1URL=https://datasheet.ciiva.com/26948/getdatasheetpartid-789067-26948543.pdf?src-supplier=Verical, ComponentLink2Description=https://datasheet.ciiva.com/22693/jdi-full-catalog-2012-01-22693744.pdf?src-supplier=Element14, ComponentLink2URL=https://datasheet.ciiva.com/22693/jdi-full-catalog-2012-01-22693744.pdf?src-supplier=Element14, Depth=0.51mm, Height=0.64mm, Length=1.02mm, Manufacturer Part Number=100R07X105KV4T, Mount="Surface Mount", Number of Pins=2, Packaging="Tape and Reel", Pricing 1="1 = 0.28000, 10 = 0.19300, 50 = 0.19300, 100 = 0.09800, 500 = 0.06700, 1000 = 0.06000, 2500 = 0.05700, 5000 = 0.05200, 10000 = 0.04800 (USD)", Radiation Hardening=No, REACH SVHC="No SVHC", RoHS=Yes, RoHS Compliant=Yes, Series=TANCERAM®, Stock 1=61365, Supplier 1=Mouser, Termination=SMD/SMT, Thickness=0.025inch, Voltage Rating (DC)=10V, Weight=2.3E-05oz, Width=0.02inch
D1: library part BAS70W-05-7-F, "BAS70W Series 70 V 70 mA Surface Mount Schottky Barrier Diode - SOT-323", Average Rectified Current=70mA, Capacitance=2pF, Case/Package=SOT-323, Forward Voltage=1V, Manufacturer=Diodes, Max Forward Surge Current (Ifsm)=100mA, Max Operating Temperature=125°C, Max Power Dissipation=200mW, Max Repetitive Reverse Voltage (Vrrm)=70V, Max Reverse Current=100nA, Min Operating Temperature=-55°C, Package Quantity=3000, Supplier Part Number 1=BAS70W-05FDICT-ND, ComponentLink1Description=https://datasheet.ciiva.com/8303/ds30113-8303106.pdf?src-supplier=Avnet, ComponentLink1URL=https://datasheet.ciiva.com/8303/ds30113-8303106.pdf?src-supplier=Avnet, ComponentLink2Description=https://datasheet.ciiva.com/4715/ds30113-42118-4715778.pdf?src-supplier=Mouser, ComponentLink2URL=https://datasheet.ciiva.com/4715/ds30113-42118-4715778.pdf?src-supplier=Mouser, ComponentLink3Description=https://datasheet.ciiva.com/16574/ds30113-16574275.pdf?src-supplier=Avnet+Europe, ComponentLink3URL=https://datasheet.ciiva.com/16574/ds30113-16574275.pdf?src-supplier=Avnet+Europe, ComponentLink4Description=https://datasheet.ciiva.com/6388/ds30113-6388462.pdf?src-supplier=Digi-Key, ComponentLink4URL=https://datasheet.ciiva.com/6388/ds30113-6388462.pdf?src-supplier=Digi-Key, Contact Plating=Tin,Matte, Current Rating=70mA, Element Configuration="Common Cathode", Forward Current=70mA, Height=1mm, Lead Free="Lead Free", Length=2.2mm, Manufacturer Part Number=BAS70W-05-7-F, Max Reverse Voltage (DC)=70V, Mount="Surface Mount", Number of Pins=3, Packaging="Tape and Reel", Peak Non-Repetitive Surge Current=100mA, Power Dissipation=200mW, Power Rating=200mW, Pricing 1="1 = 0.39000, 10 = 0.32300, 100 = 0.17120, 500 = 0.11262, 1000 = 0.07658 (USD)", Radiation Hardening=No, Reverse Recovery Time=5ns, RoHS=Yes, RoHS Compliant=Yes, Series=-, Stock 1=289, Supplier 1=Digi-Key, Termination=SMD/SMT, Voltage Rating (DC)=70V, Weight=0.000212oz, Width=1.35mm
D2: library part CMP-22017-000007-1, "LED GREEN CLEAR CHIP SMD", Case/Package=0805, Case Code (Metric)=2012, Color=Green, Forward Current=30mA, Forward Voltage=2.1V, Lens Color=Colorless, Max Operating Temperature=85°C, Min Operating Temperature=-55°C, Package Quantity=1, Power Dissipation=100mW, Reverse Voltage=5V, Test Current=10mA, Case Code (Imperial)=0805, Depth=1.25mm, Dominant Wavelength=569nm, Height=0.8mm, Illumination Color=Green, Lead Free="Lead Free", Length=2mm, Lens Style=Diffused, Lens Transparency=Clear, Luminous Intensity=12mcd, Mount="Surface Mount", Number of Elements=1, Number of LEDs=1, Number of Pins=2, Packaging="Tape and Reel", Power Rating=100mW, Radiation Hardening=No, Viewing Angle=130°, Wavelength=585nm, Width=1.25mm
DS1: library part CMP-0918-00001-1, "PICOLED-RGB LED, 5 mA, -40 to 85 degC, 4-Pin 1 x 1 x 0.25 mm SMD, RoHS, Tape and Reel", Manufacturer="ROHM Semiconductor", Temperature Range="-40 to 85 degC", ComponentLink1Description="Manufacturer URL", ComponentLink1URL=http://www.rohm.com/, ComponentLink2Description=Datasheet, ComponentLink2URL=http://rohmfs.rohm.com/en/products/databook/datasheet/opto/led/chip_multi/smlp34.pdf, DatasheetVersion="Rev. G", IF(RGB)="5 mA", IR(RGB)="10 uA Max.", Mounting Technology="Surface Mount", PackageDescription="4-Pin SMD, Body 1 x 1 mm, Pitch 0.85 mm", PackageReference=SMLP34, Packing="Tape and Reel", PartNumber=SMLP34RGB2W3, RoHS=TRUE, VF(Blue)="3.2 V Typ.", VF(Green)="3.3 V Typ.", VF(Red)="2.2 V Typ.", VR(RGB)="5 V"
H1 H2 H3 H4 H5 H6 H7 H8 H9 H10 H11 H14 H17 H18 H19 H20 H21 H22 H23 H24 H25 H26 H27 H28: library part "Header 1x1", "Header 1x1, hole"
H12-13: library part 961102-6404-AR, "Header; PinStrip; CopperAlloy; HighTempThermoplastic; 2Cnts; 2A; Str; 961Series", Color=Black, Current Rating=2A, Flammability Rating="UL94 V-0", Manufacturer=3M, Max Operating Temperature=105°C, Min Operating Temperature=-25°C, Package Quantity=3000, Supplier Part Number 1=3M9457-02-ND, ComponentLink1Description=https://datasheet.ciiva.com/731/ts2181-731431.pdf?src-supplier=Digi-Key, ComponentLink1URL=https://datasheet.ciiva.com/731/ts2181-731431.pdf?src-supplier=Digi-Key, ComponentLink2Description=https://datasheet.ciiva.com/5724/ts2181-5724889.pdf?src-supplier=Farnell, ComponentLink2URL=https://datasheet.ciiva.com/5724/ts2181-5724889.pdf?src-supplier=Farnell, ComponentLink3Description=https://datasheet.ciiva.com/7997/ts2181-7997272.pdf?src-supplier=Element14, ComponentLink3URL=https://datasheet.ciiva.com/7997/ts2181-7997272.pdf?src-supplier=Element14, ComponentLink4Description=https://datasheet.ciiva.com/14617/70237733-14617125.pdf?src-supplier=Allied+Electronics, ComponentLink4URL=https://datasheet.ciiva.com/14617/70237733-14617125.pdf?src-supplier=Allied+Electronics, ComponentLink5Description=https://datasheet.ciiva.com/46428/1794052-46428554.pdf?src-supplier=Element14, ComponentLink5URL=https://datasheet.ciiva.com/46428/1794052-46428554.pdf?src-supplier=Element14, Connector Type=Header, Contact Finish - Mating=GOLD, Contact Gender=Male, Contact Material="Copper Alloy,Copper", Contact Mating Length=0.22inch, Contact Plating=Gold, Contact Post Length=3.3mm, Contact Shape=Square, Contact Type="Male Pin", Depth=2.5mm, Fastening Type=Pull, Gender=Male, Housing Color=Black, Housing Material=Thermoplastic, Insulation Color=Black, Insulation Material=Thermoplastic, Length=5.08mm, Manufacturer Part Number=961102-6404-AR, Max Current Rating=2A, Mount="Through Hole", Number of Contacts=2, Number of Positions=2, Number of Rows=1, Orientation=Straight, Packaging=Bulk, Pitch=2.54mm, Pricing 1="1 = 0.22000, 10 = 0.21000, 25 = 0.17920, 50 = 0.15680, 100 = 0.14560, 250 = 0.12880, 500 = 0.12320 (USD)", REACH SVHC=Unknown, RoHS=Yes, RoHS Compliant=Yes, Series=961, Stock 1=52622, Supplier 1=Digi-Key, Termination=Solder
H15 H16: library part SSW-110-23-S-D, "Tiger Buy Socket Strip With Pcb Tails, 0.100\" Pitch Rohs Compliant: Yes", Manufacturer=Samtec, Supplier Part Number 1=2079196, ComponentLink1Description=ftp://ftp.samtec.com/webfiles/PDF/SSQ_TH.PDF?src-supplier=Avnet, ComponentLink1URL=ftp://ftp.samtec.com/webfiles/PDF/SSQ_TH.PDF?src-supplier=Avnet, Contact Plating=Gold, Gender=Female, Manufacturer Part Number=SSW-110-23-S-D, Mount="Through Hole", Number of Contacts=20, Number of Rows=2, Packaging=Bulk, Pitch=2.54mm, Pricing 1="1 = 2.69000, 10 = 2.46000, 50 = 2.32000, 100 = 2.19000, 250 = 1.97000 (GBP)", Radiation Hardening=No, RoHS=Yes, RoHS Compliant=Yes, Stock 1=63, Supplier 1=RSComponents, Termination=Solder
J1: "Adapter Cbl Plug Of Nails 10PIN", Manufacturer=Tag-Connect, Package Quantity=1, Supplier Part Number 1=TC2050-IDC-NL-ND, ComponentLink1Description=https://datasheet.ciiva.com/2385/tc2050-idc-nl20datasheet-2385407.pdf?src-supplier=Digi-Key, ComponentLink1URL=https://datasheet.ciiva.com/2385/tc2050-idc-nl20datasheet-2385407.pdf?src-supplier=Digi-Key, Manufacturer Part Number=TC2050-IDC-NL, Pricing 1="1 = 39.00000 (USD)", RoHS=Yes, Series=Plug-Of-Nails™, Stock 1=1455, Supplier 1=Digi-Key
J1 J2: library part CMP-2000-05146-1, "Micro USB-B Receptacle Connector, Right Angle, 30 V, -30 to 85 degC, 5-Pin SMD, RoHS, Tape and Reel", Current Rating (Max)=1/ContactA, Manufacturer="Hirose Electric", Operating Temperature Max Deg. C=85C, Operating Temperature Min Deg. C=-30C, Operating Temp Range=-30Cto85C, Package Description="5-Pin Surface Mount Device, Body 7.9 x 5 mm, Pitch 0.65 mm", Package Reference=ZX62-B-5PA, Voltage Rating Max=30VAC, Body Orientation=RightAngle, Contact Material=CopperAlloy, Contact Plating=Gold, Datasheet URL=https://datasheet.ciiva.com/11731/0900766b80d9c4df-11731324.pdf, Datasheet Version=Jul-08, DELETED=Compliant, Gender=RCP, Manufacturer URL=https://www.hirose.com, Mounting Style=SurfaceMount, Number of Contacts=5POS, Number of Ports=1Port, Number of Terminals=5, Packaging=TapeandReel, Pitch (mm)=0.65mm, Product Depth (mm)=5.6mm, Product Diameter (mm)=NotRequiredmm, Product Height (mm)=2.8mm, Product Length (mm)=7.9mm, Termination Method=Solder, Type=MicroUSBTypeB
Q1 Q2 Q3: library part CMP-0630-00210-1, "Digital Transistor (BRT), R1=10 kOhm, R2=10 kOhm, NPN Transistor, 3-Pin SC-75, Pb-Free, Tape and Reel", Manufacturer="On Semiconductor", ComponentLink1Description="Manufacturer URL", ComponentLink1URL=http://www.onsemi.com/, ComponentLink2Description=Datasheet, ComponentLink2URL=http://www.onsemi.cn/pub_link/Collateral/DTC114E-D.PDF, ComponentLink3Description="Package Specification", ComponentLink3URL=http://www.onsemi.com/pub_link/Collateral/463-01.PDF, DatasheetVersion="Rev. 5", hFE Min=35, IC Continuous (A)=0.1, Mounting Technology="Surface Mount", PackageDescription="3-Pin Small Outline Transistor, Body 1.6 x 0.8 mm, Pitch 0.5 mm", PackageReference=SC-75-3-463-01, PackageVersion="Rev. F, 07/2005", Packing="Tape and Reel", PartNumber=DTC114EET1G, Polarity=NPN, R1/R2 Typ=1, RoHS=TRUE, V(BR)CEO Min (V)=50
R1 R2 R3 R4 R5 R6 R7 R8 R9 R10 R11 R12 R13 R14 R15 R16 R17 R18 R19 R20 R21 R22 R23 R24 R25 R26 R27 R28 R29: library part MCR01MRTF1004, "Res Thick Film 0402 1M Ohm 1% 0.063W(1/16W) ±100ppm/C Pad SMD T/R", Case/Package=0402, Case Code (Metric)=1005, Manufacturer=Rohm, Max Operating Temperature=155°C, Max Power Dissipation=63mW, Min Operating Temperature=-55°C, Package Quantity=1, Resistance=1MR, Resistor Type="Thick Film", Supplier Part Number 1=RHM1.00MCDCT-ND, Temperature Coefficient=100ppm/°C, Tolerance=1%, Voltage Rating (DC)=50V, Case Code (Imperial)=0402, ComponentLink1Description=https://datasheet.ciiva.com/2519/mcr01mrt-seriesspec-2519945.pdf?src-supplier=Digi-Key, ComponentLink1URL=https://datasheet.ciiva.com/2519/mcr01mrt-seriesspec-2519945.pdf?src-supplier=Digi-Key, ComponentLink2Description=https://datasheet.ciiva.com/2519/mcr01mrt-seriesspec-2519946.pdf?src-supplier=Digi-Key, ComponentLink2URL=https://datasheet.ciiva.com/2519/mcr01mrt-seriesspec-2519946.pdf?src-supplier=Digi-Key, ComponentLink3Description=https://datasheet.ciiva.com/2519/mcr01mrt-seriesspec-2519947.pdf?src-supplier=Digi-Key, ComponentLink3URL=https://datasheet.ciiva.com/2519/mcr01mrt-seriesspec-2519947.pdf?src-supplier=Digi-Key, Height=0.016inch, Lead Free="Lead Free", Length=0.039inch, Manufacturer Part Number=MCR01MRTF1004, Number of Terminations=2, Packaging="Tape and Reel", RoHS=Yes, RoHS Compliant=Yes, Series=MCR, Stock 1=0, Supplier 1=Digi-Key, Width=0.02inch
RESET SW1 SW2: library part CMP-1677-00001-4, "Sealed Tactile Switch, SPST-NO, 3 to 24 V, -25 to 70 degC, 4-Pin SMD, RoHS, Bulk", Current Rating="50 mA", Manufacturer=Omron, Max Operating Temperature="70 degC", Min Operating Temperature="-25 degC", Package Quantity=1500, Voltage Rating="24 V", ComponentLink1Description="Manufacturer URL", ComponentLink1URL=http://www.omron.com/, ComponentLink2Description=Datasheet, ComponentLink2URL=http://www.omron.com/ecb/products/pdf/en-b3s.pdf, Contact Plating=Silver, DatasheetVersion=10/2014, Height="4.3 mm", Length="6.6 mm", Mount="Surface Mount", Mounting Technology="Surface Mount", PackageDescription="4-Pin Surface Mount Device, Body 6.6 x 6 mm", PackageReference=B3S-1000, Packaging=Bulk, REACH SVHC="No SVHC", RoHSCompliant=true
SW3: "C&k Components JS202011SCQN / Switch Slide DPDT 6VDC 0.3A SMT", Actuator Color=Black, Contact Current Rating=300mA, Contact Resistance=70mR, Flammability Rating="UL94 V-2", Manufacturer="ITT C&K", Max Operating Temperature=85°C, Max Voltage Rating (DC)=6V, Min Operating Temperature=-20°C, Package Quantity=1, Supplier Part Number 1=401-2002-1-ND, Actuator Length=2mm, Actuator Material=Nylon,Polyamide,PA46, Actuator Type=Standard, ComponentLink1Description=https://datasheet.ciiva.com/2889/js-29aug13-2889127.pdf?src-supplier=Digi-Key, ComponentLink1URL=https://datasheet.ciiva.com/2889/js-29aug13-2889127.pdf?src-supplier=Digi-Key, ComponentLink2Description=https://datasheet.ciiva.com/23829/1707718-23829488.pdf?src-supplier=Newark, ComponentLink2URL=https://datasheet.ciiva.com/23829/1707718-23829488.pdf?src-supplier=Newark, ComponentLink3Description=https://datasheet.ciiva.com/8625/js-9dec14-8625470.pdf?src-supplier=Avnet, ComponentLink3URL=https://datasheet.ciiva.com/8625/js-9dec14-8625470.pdf?src-supplier=Avnet, ComponentLink4Description=https://datasheet.ciiva.com/2889/js-15sept15-2889128.pdf?src-supplier=Digi-Key, ComponentLink4URL=https://datasheet.ciiva.com/2889/js-15sept15-2889128.pdf?src-supplier=Digi-Key, ComponentLink5Description=https://datasheet.ciiva.com/2889/js-15sept15-2889129.pdf?src-supplier=Digi-Key, ComponentLink5URL=https://datasheet.ciiva.com/2889/js-15sept15-2889129.pdf?src-supplier=Digi-Key, ComponentLink6Description=https://datasheet.ciiva.com/22630/1707718-22630697.pdf?src-supplier=Element14, ComponentLink6URL=https://datasheet.ciiva.com/22630/1707718-22630697.pdf?src-supplier=Element14, Contact Material="Copper Alloy", Contact Plating=Silver, Current Rating=300mA, Depth=7.5mm, Electrical Life=5000Cycles, Housing Material=Nylon, Lead Free="Lead Free", Length=9mm, Manufacturer Part Number=JS202011SCQN, Max Current Rating=300mA, Mount="Surface Mount", Orientation=Vertical, Packaging="Tape and Reel", Pricing 1="1 = 0.55000, 10 = 0.53000, 25 = 0.51040, 100 = 0.44180, 250 = 0.40252, 500 = 0.37306 (USD)", Radiation Hardening=No, REACH SVHC="No SVHC", RoHS=Yes, Series=JS, Stock 1=95737, Supplier 1=Digi-Key, Switch Function=On-On, Switch Travel=2mm, Termination="Gull Wing", Throw Configuration=DPDT, Voltage Rating (DC)=6V
U1 U4: "MCU 32-bit Stellaris ARM Cortex M4F RISC 256KB Flash 1.2V/3.3V 64-Pin LQFP Tray", Case/Package=LQFP, Manufacturer="Texas Instruments", Max Frequency=80MHz, Max Operating Temperature=85°C, Max Power Dissipation=560mW, Min Operating Temperature=-40°C, ComponentLink1Description=http://www.ti.com/lit/ds/symlink/lm4f120h5qr.pdf?src-supplier=Avnet, ComponentLink1URL=http://www.ti.com/lit/ds/symlink/lm4f120h5qr.pdf?src-supplier=Avnet, Core Architecture=ARM, Data Bus Width=32b, Interface=I2C,USB,CAN,UART, Manufacturer Part Number=LM4F120H5QRFIG, Memory Size=256KB, Memory Type=FLASH, Number of Programmable I/O=43, Number of Timers/Counters=13, Packaging=Tray, Radiation Hardening=No, RAM Size=32KB, RoHS=Yes, RoHS Compliant=Yes, Stock 1=0, Supplier 1="Arrow Electronics", Supplier Part Number 1=LM4F120H5QRFIG, Watchdog Timer=Yes
U2: library part CMP-0395-00621-2, "Single Output Low Noise LDO, 400 mA, Fixed 3.3 V Output, 1.7 to 5.5 V Input, with Reverse Current Protection, 8-pin SON (DRB), -40 to 85 degC, Green (RoHS & no Sb/Br)", Manufacturer="Texas Instruments", Rating=Catalog, Accuracy(%)=1, ComponentLink1Description="Manufacturer URL", ComponentLink1URL=http://www.ti.com/, ComponentLink2Description=Datasheet, ComponentLink2URL=http://www.ti.com/general/docs/lit/getliterature.tsp?genericPartNumber=TPS73633&fileType=pdf, ComponentLink3Description="Package Specification", ComponentLink3URL=http://www.ti.com/litv/pdf/mpds118h, ComponentLink4Description="URL Link1", ComponentLink4URL="Samples URL:http://www.ti.com/product/tps73633#samples", DatasheetVersion=SBVS038T, Eco-Plan="Green (RoHS & no Sb/Br)", Fixed Output Options(V)=3.3, Iout(Max)(A)=0.4, Iq(Typ)(mA)=0.3, Mounting Technology="Surface Mount", PackageDescription="8-Pin Plastic Small Outline, Body 3 x 3 mm, Pitch 0.65 mm", PackageReference=DRB0008A, PackageVersion=4203482-2/K, PartNumber=TPS73633DRBR, SubFamily="Single Channel LDO", Vdo(Typ)(mV)=75, Vin(Max)(V)=5.5, Vin(Min)(V)=1.7, Vout Adj(Max)(V)=3.3, Vout Adj(Min)(V)=3.3
U3: library part CMP-0332-00609-2, "Voltage Supervisor with Active-Low, Open Drain Reset, 1 Supply Monitored, -40 to 125 degC, 3-pin SOT-23 (DBZ), Green (RoHS & no Sb/Br)", Manufacturer="Texas Instruments", Rating=Catalog, Threshold Voltage 1 (typ)(Typ)(V)=2.93, # of Supplies Monitored=1, Code_JEDEC=TO-236-AB, ComponentLink1Description=Datasheet, ComponentLink1URL=http://www.ti.com/general/docs/lit/getliterature.tsp?genericPartNumber=TLV803S&fileType=pdf, DatasheetVersion=SBVS157B, Iq(Typ)(uA)=9, Mounting Technology="Surface Mount", Output Driver Type / Reset Output="Active-low, Open-drain", PackageDescription="3-Pin Plastic Small-Outline Package, 0.95 mm Pitch, 2.4 mm Lead Span", PackageReference=DBZ0003A, PackageVersion="revB, Apr-2005", PartNumber=TLV803SDBZR, Reset Threshold Accuracy(%)=2, SubFamily="Supervisor and Reset IC", Time Delay(ms)=200, VCC(Max)(V)=6, VCC(Min)(V)=1.1
Y1 Y3: library part ABM3-16.000MHZ-B2-T, "Crystal 16MHz ±20ppm (Tol) ±50ppm (Stability) 18pF FUND 40Ohm 2-Pin Mini-CSMD T/R", Case/Package=CSMD, ESR (Equivalent Series Resistance)=40R, Frequency Stability=50ppm, Frequency Tolerance=20ppm, Load Capacitance=18pF, Manufacturer=Abracon, Max Operating Temperature=70°C, Min Operating Temperature=-20°C, Operating Frequency="16 MHz", Package Quantity=1000, Resistor Type=Ceramic, Series Resistance=60R, Supplier Part Number 1=535-9103-6-ND, Accuracy=20ppm, ComponentLink1Description=https://datasheet.ciiva.com/15116/getdatasheetpartid-719852-15116752.pdf?src-supplier=Verical, ComponentLink1URL=https://datasheet.ciiva.com/15116/getdatasheetpartid-719852-15116752.pdf?src-supplier=Verical, ComponentLink2Description=https://datasheet.ciiva.com/855/abm3-855737.pdf?src-supplier=Digi-Key, ComponentLink2URL=https://datasheet.ciiva.com/855/abm3-855737.pdf?src-supplier=Digi-Key, ComponentLink3Description=https://datasheet.ciiva.com/855/abm3-855738.pdf?src-supplier=Digi-Key, ComponentLink3URL=https://datasheet.ciiva.com/855/abm3-855738.pdf?src-supplier=Digi-Key, ComponentLink4Description=https://datasheet.ciiva.com/855/abm3-855739.pdf?src-supplier=Digi-Key, ComponentLink4URL=https://datasheet.ciiva.com/855/abm3-855739.pdf?src-supplier=Digi-Key, ComponentLink5Description=https://datasheet.ciiva.com/4945/abm3-47699-4945240.pdf?src-supplier=Mouser, ComponentLink5URL=https://datasheet.ciiva.com/4945/abm3-47699-4945240.pdf?src-supplier=Mouser, ComponentLink6Description=https://datasheet.ciiva.com/16209/abm3-16209965.pdf?src-supplier=Future+Electronics, ComponentLink6URL=https://datasheet.ciiva.com/16209/abm3-16209965.pdf?src-supplier=Future+Electronics, Depth=3.2mm, Frequency=16MHz, Height=0.051inch, Lead Free="Lead Free", Length=5mm, Manufacturer Part Number=ABM3-16.000MHZ-B2-T, Mount="Surface Mount", Number of Pins=2, Packaging="Tape and Reel", Pricing 1="1 = 0.95000, 10 = 0.83900, 50 = 0.78440, 100 = 0.69310, 500 = 0.65664 (USD)", REACH SVHC=Yes, RoHS=Yes, Series=ABM3, Stock 1=0, Supplier 1=Digi-Key, Termination=SMD/SMT, Tolerance=20ppm, Width=3.2mm
Y2: library part AB26TRB-32.768KHZ-T, "Crystal, Cylindrical 32.768Khz, 12.5F, 20Ppm, 2 X 6 Formed Lead Smd Rohs Compliant: Yes", Case/Package=Radial, ESR (Equivalent Series Resistance)=50kR, Frequency=32.768kHz, Frequency Stability=-0.034ppm, Frequency Tolerance=20ppm, Load Capacitance=12.5pF, Manufacturer=Abracon, Max Operating Temperature=85°C, Min Operating Temperature=-40°C, Operating Frequency="32.768 kHz", Package Quantity=500, Supplier Part Number 1=535-9033-1-ND, ComponentLink1Description=https://datasheet.ciiva.com/4945/ab26tr-30941-4945140.pdf?src-supplier=Mouser, ComponentLink1URL=https://datasheet.ciiva.com/4945/ab26tr-30941-4945140.pdf?src-supplier=Mouser, ComponentLink2Description=https://datasheet.ciiva.com/1357/ab26tr-1357201.pdf?src-supplier=Element14, ComponentLink2URL=https://datasheet.ciiva.com/1357/ab26tr-1357201.pdf?src-supplier=Element14, ComponentLink3Description=https://datasheet.ciiva.com/854/ab26trb-854381.pdf?src-supplier=Digi-Key, ComponentLink3URL=https://datasheet.ciiva.com/854/ab26trb-854381.pdf?src-supplier=Digi-Key, ComponentLink4Description=https://datasheet.ciiva.com/854/ab26trb-854382.pdf?src-supplier=Digi-Key, ComponentLink4URL=https://datasheet.ciiva.com/854/ab26trb-854382.pdf?src-supplier=Digi-Key, ComponentLink5Description=https://datasheet.ciiva.com/854/ab26trb-854383.pdf?src-supplier=Digi-Key, ComponentLink5URL=https://datasheet.ciiva.com/854/ab26trb-854383.pdf?src-supplier=Digi-Key, ComponentLink6Description=https://datasheet.ciiva.com/3174/ab26trb-3174233.pdf?src-supplier=Avnet, ComponentLink6URL=https://datasheet.ciiva.com/3174/ab26trb-3174233.pdf?src-supplier=Avnet, ComponentLink7Description=https://datasheet.ciiva.com/16215/ab26trb-16215317.pdf?src-supplier=Future+Electronics, ComponentLink7URL=https://datasheet.ciiva.com/16215/ab26trb-16215317.pdf?src-supplier=Future+Electronics, ComponentLink8Description=https://datasheet.ciiva.com/28508/270658-28508373.pdf?src-supplier=Element14, ComponentLink8URL=https://datasheet.ciiva.com/28508/270658-28508373.pdf?src-supplier=Element14, Depth=1.9mm, Height=0.075inch, Lead Free="Lead Free", Lead Pitch=2.54mm, Length=6mm, Manufacturer Part Number=AB26TRB-32.768KHZ-T, Mount="Surface Mount", Number of Pins=2, Packaging="Tape and Reel", Pricing 1="1 = 0.65000, 10 = 0.57400, 50 = 0.53660, 100 = 0.47420, 500 = 0.44928, 1000 = 0.37440 (USD)", REACH SVHC="No SVHC", RoHS=Yes, Series=AB26TRB, Series Resistance=50kR, Stock 1=66665, Supplier 1=Digi-Key, Termination=Radial, Tolerance=20ppm

## Via types
v1: diameter 20, hole 10, L1 to L3, 53 vias
v2: diameter 20, hole 10, L1 to L4, 49 vias
v3: diameter 20, hole 10, L3 to L6, 10 vias
v4: diameter 20, hole 10, L1 to L2 (GND), 8 vias
v5: diameter 20, hole 10, L4 to L6, 7 vias
v6: diameter 20, hole 10, L3 to L4, 3 vias
v7: diameter 20, hole 10, L1 to L6, 2 vias

## Nets (pads, with @x,y where several pads share a name; then routed paths per layer and width w, separated by ;. In a path a pad name is that pad's centre, name@x,y a point inside that pad or via, vN(x,y) a via of type N, cw(c..) or ccw(c..) an arc to the next point about the centre after c; other vN are vias at no path point)
+3.3V: H12-13.2 H16.1 H19.1 R12.2 R22.1 R23.1 R26.2 R29.2 U2.1 U4.37 U4.45 | length 5813.7
  L1 w4.66: U2.1 652.99,2201.61 R29.2@689.61,2165 ; v2(650,2165) R29.2@689.61,2165 ; R29.2 R29.2@689.61,2165 ; R26.2 v2(853.28,2215) ; v2(1418.11,2285) 1422.91,2289.8 U4.45 ; v2@1420,2132.32 U4.37
  L1 w10: H12-13.2 643,1872 R12.2 ; v2(1855,100) 1890,65 H19.1 ; v2(1915,2435) R22.1 R23.1
  L4 w10: H16.1 295,1550 295,1858.44 326.56,1890 625,1890 H12-13.2 630,1890 630,2145 v2(650,2165) 803.28,2165 v2(853.28,2215) 943.28,2305 1398.11,2305 v2(1418.11,2285) ; v2(1418.11,2132.32) v2(1418.11,2285) ; v2(1855,100) 1855,328.24 1910.76,384 1949.14,384 1974.53,409.39 1974.53,2110.47 1965,2120 1965,2385 v2(1915,2435) 1570,2435 1420,2285 v2(1418.11,2285)
+ICDI_VBUS: H21.1 J2.1 R25.1 SW3.1 SW3.4 | length 1098.9
  L1 w10: v1(143.64,2040) 143.64,2070.89 105,2109.53 H21.1 105,2251.61 SW3.1 SW3.4 103.15,2528.15 135,2560 349.61,2560 399.61,2510 R25.1 ; J2.1 213.21,1871.81 246.81,1871.81 260,1885 v1(260,1930)
  L3 w10: v1(143.64,2040) 251.73,1931.91 258.09,1931.91 v1(260,1930)